# Altium PCB Plate.PcbDoc (part 1 of 2)
Units mm, origin at the board's own origin, x right, y up, seen from the top; angles counter-clockwise.
Board outline 61.6 x 65.4 mm, 4 copper layers (Top Layer, MID1, MID2, Bottom Layer), stack 1.082 mm thick; 79 components, 55 nets, 335 pads, 121 vias.
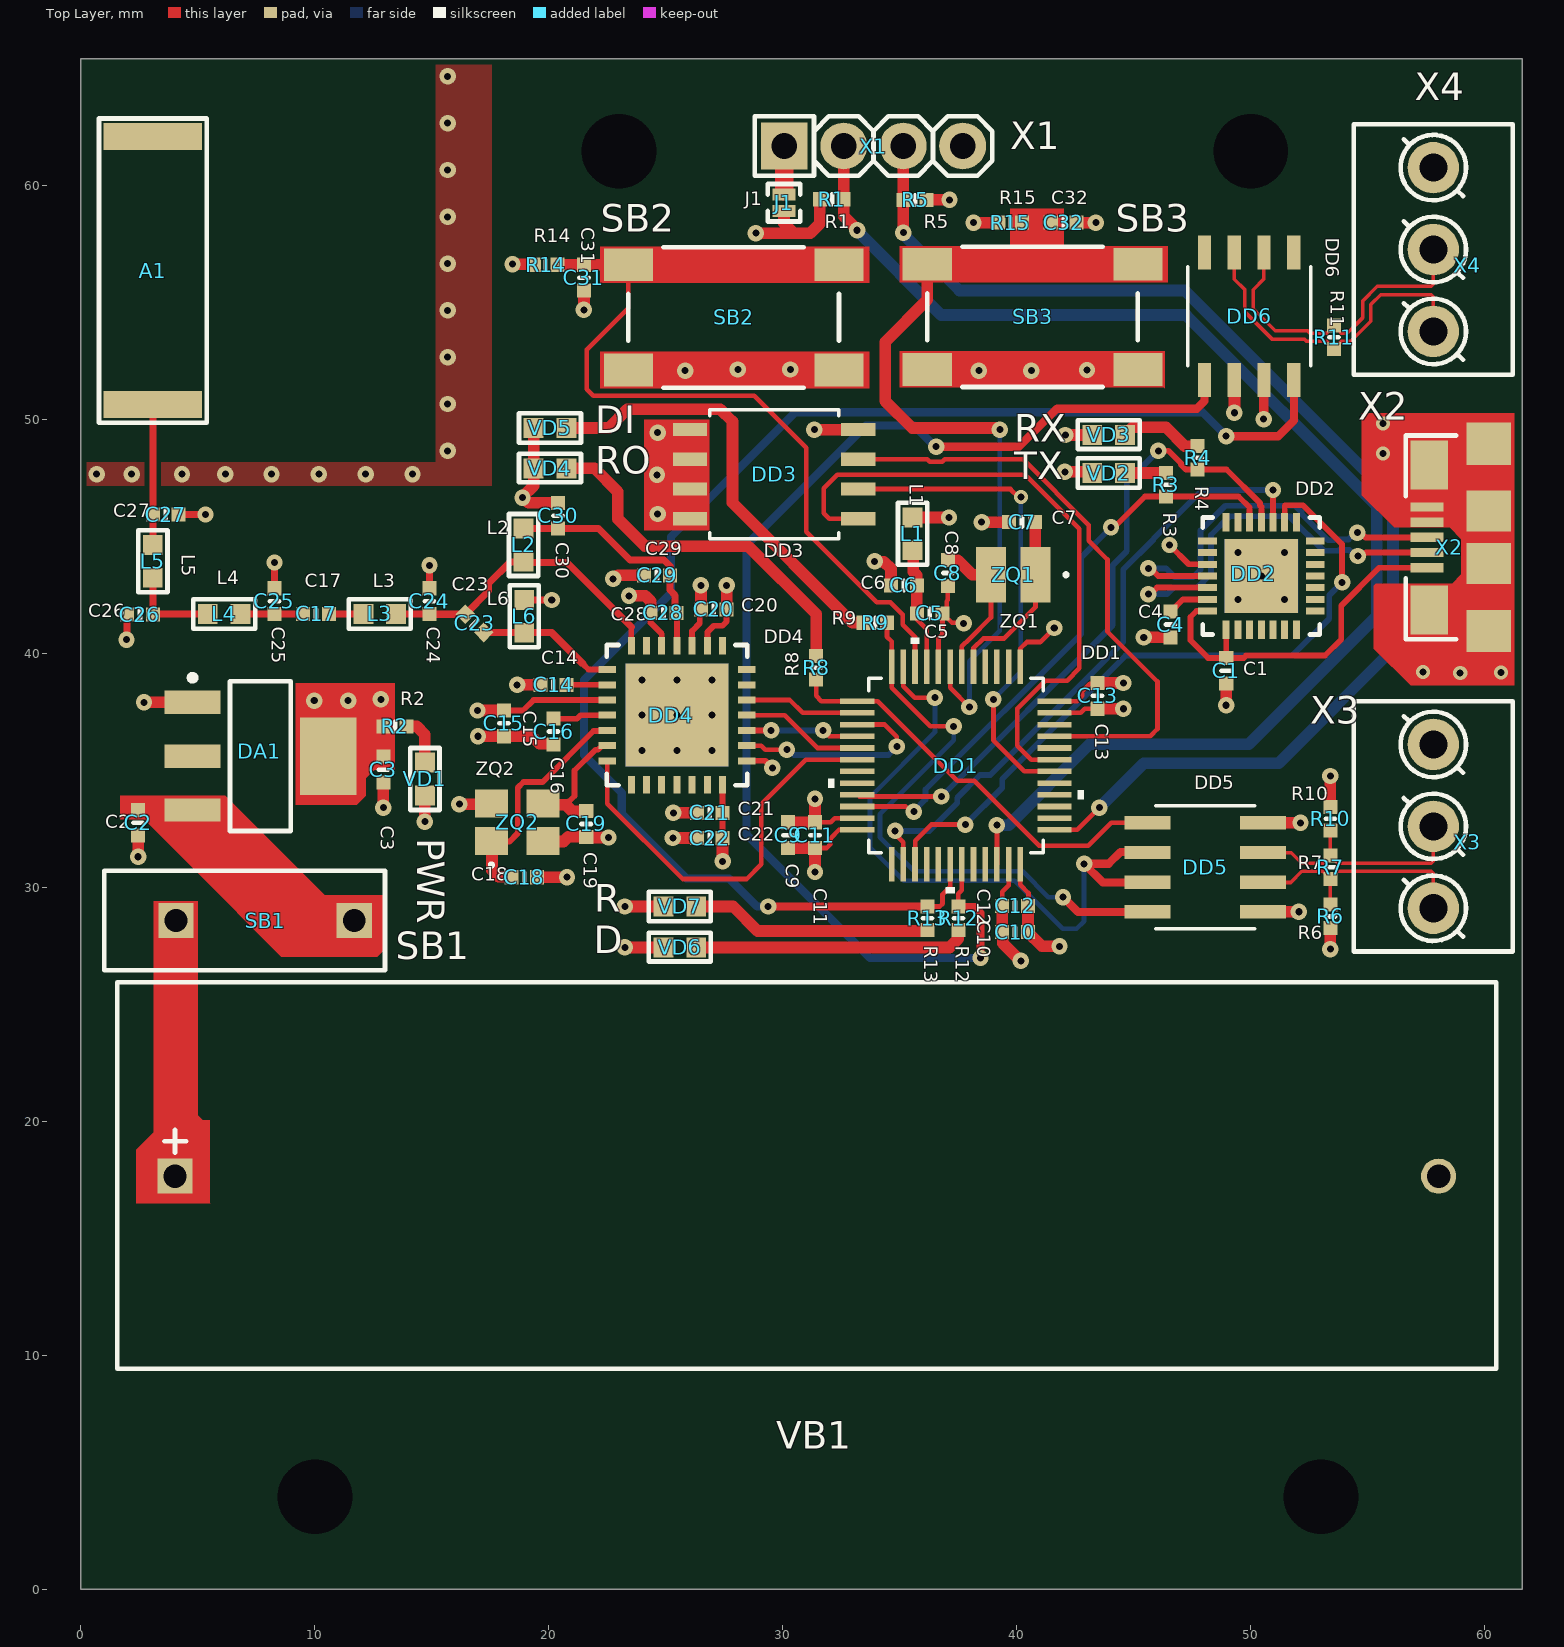
[diagram p0: Top Layer view]
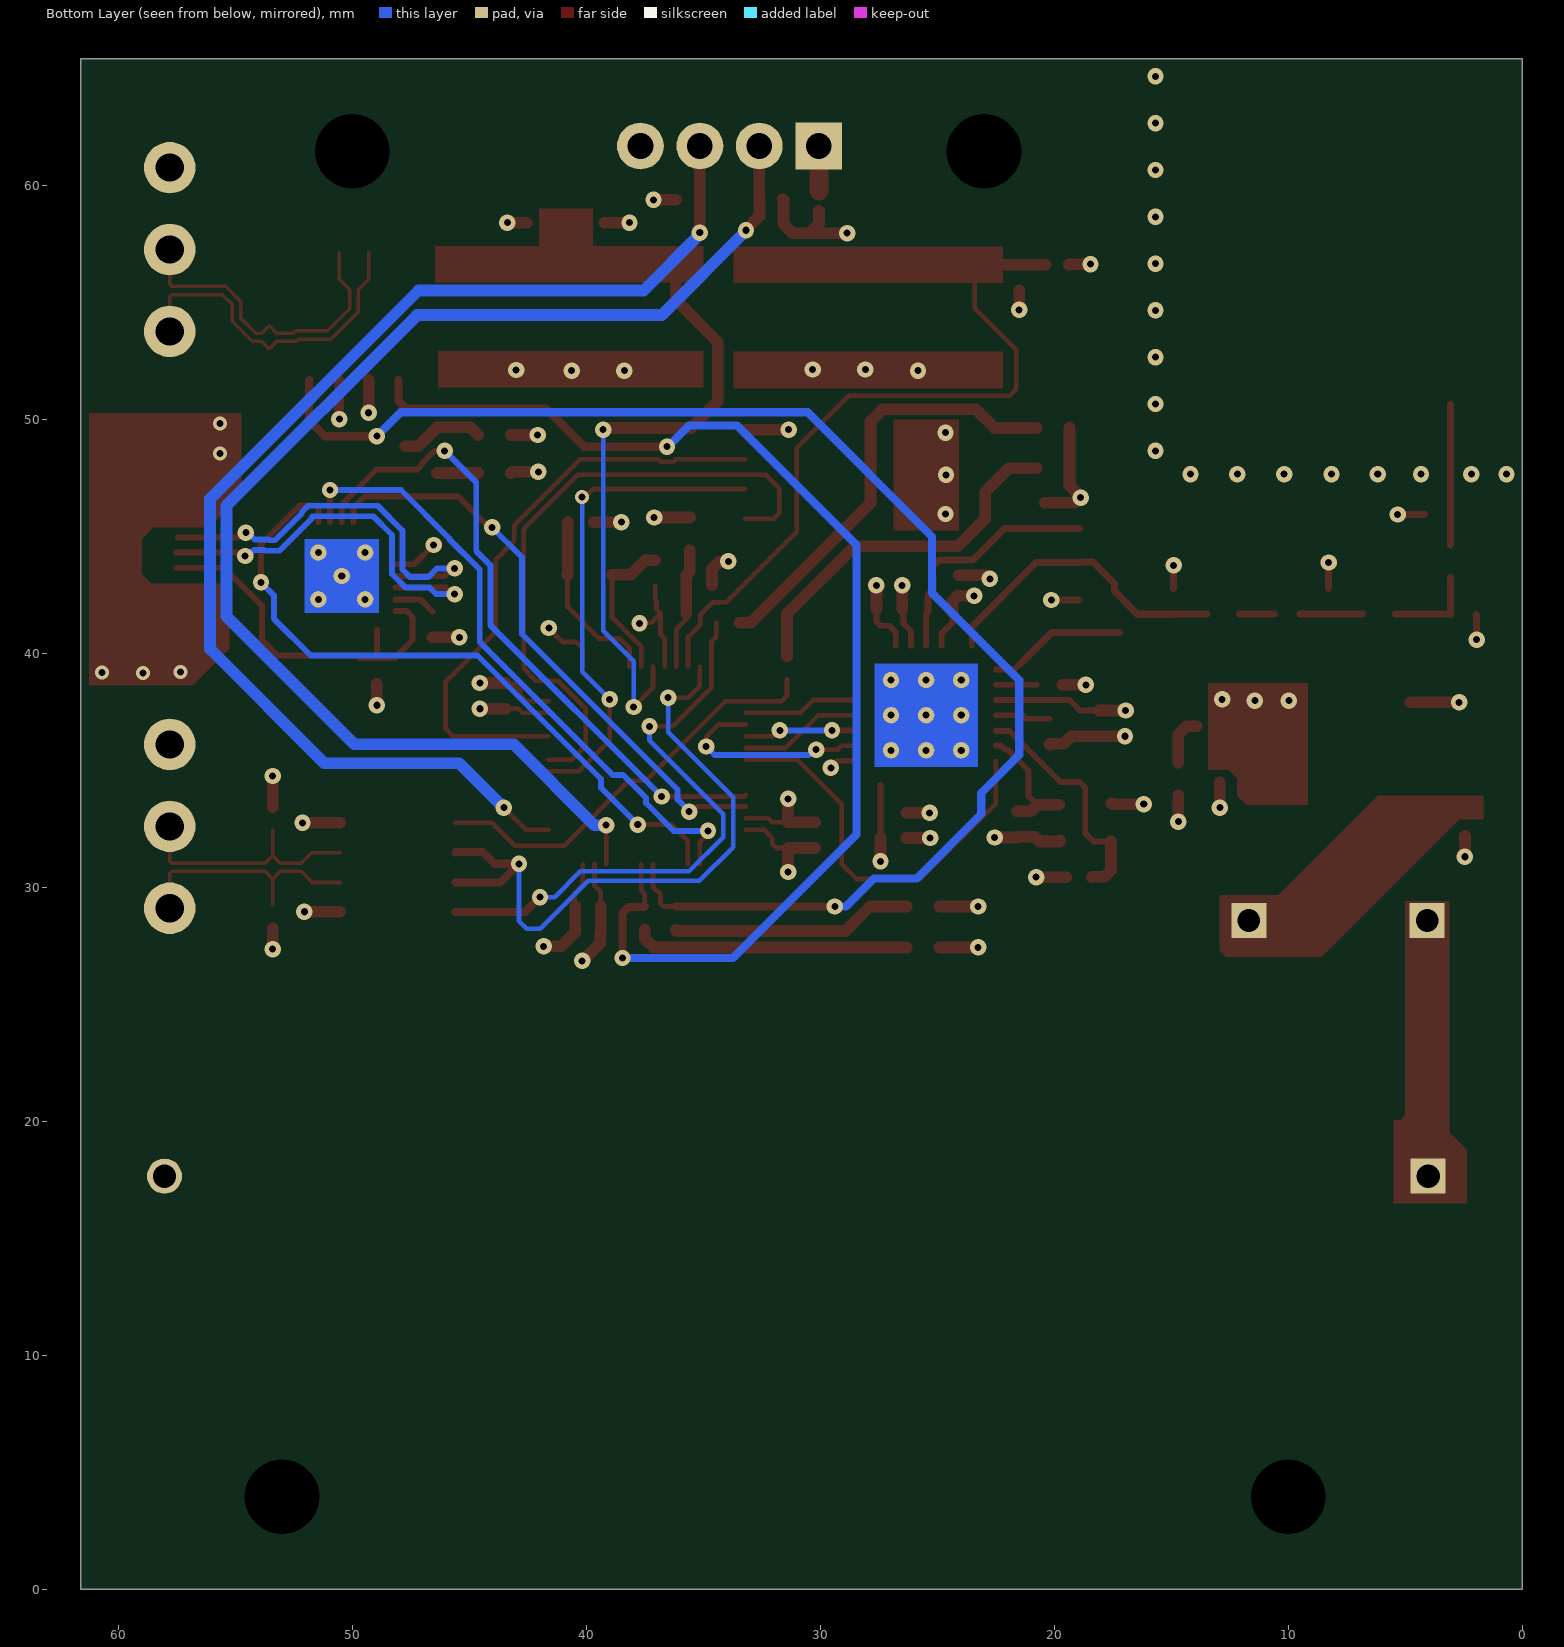
[diagram p1: Bottom Layer view, seen from below]
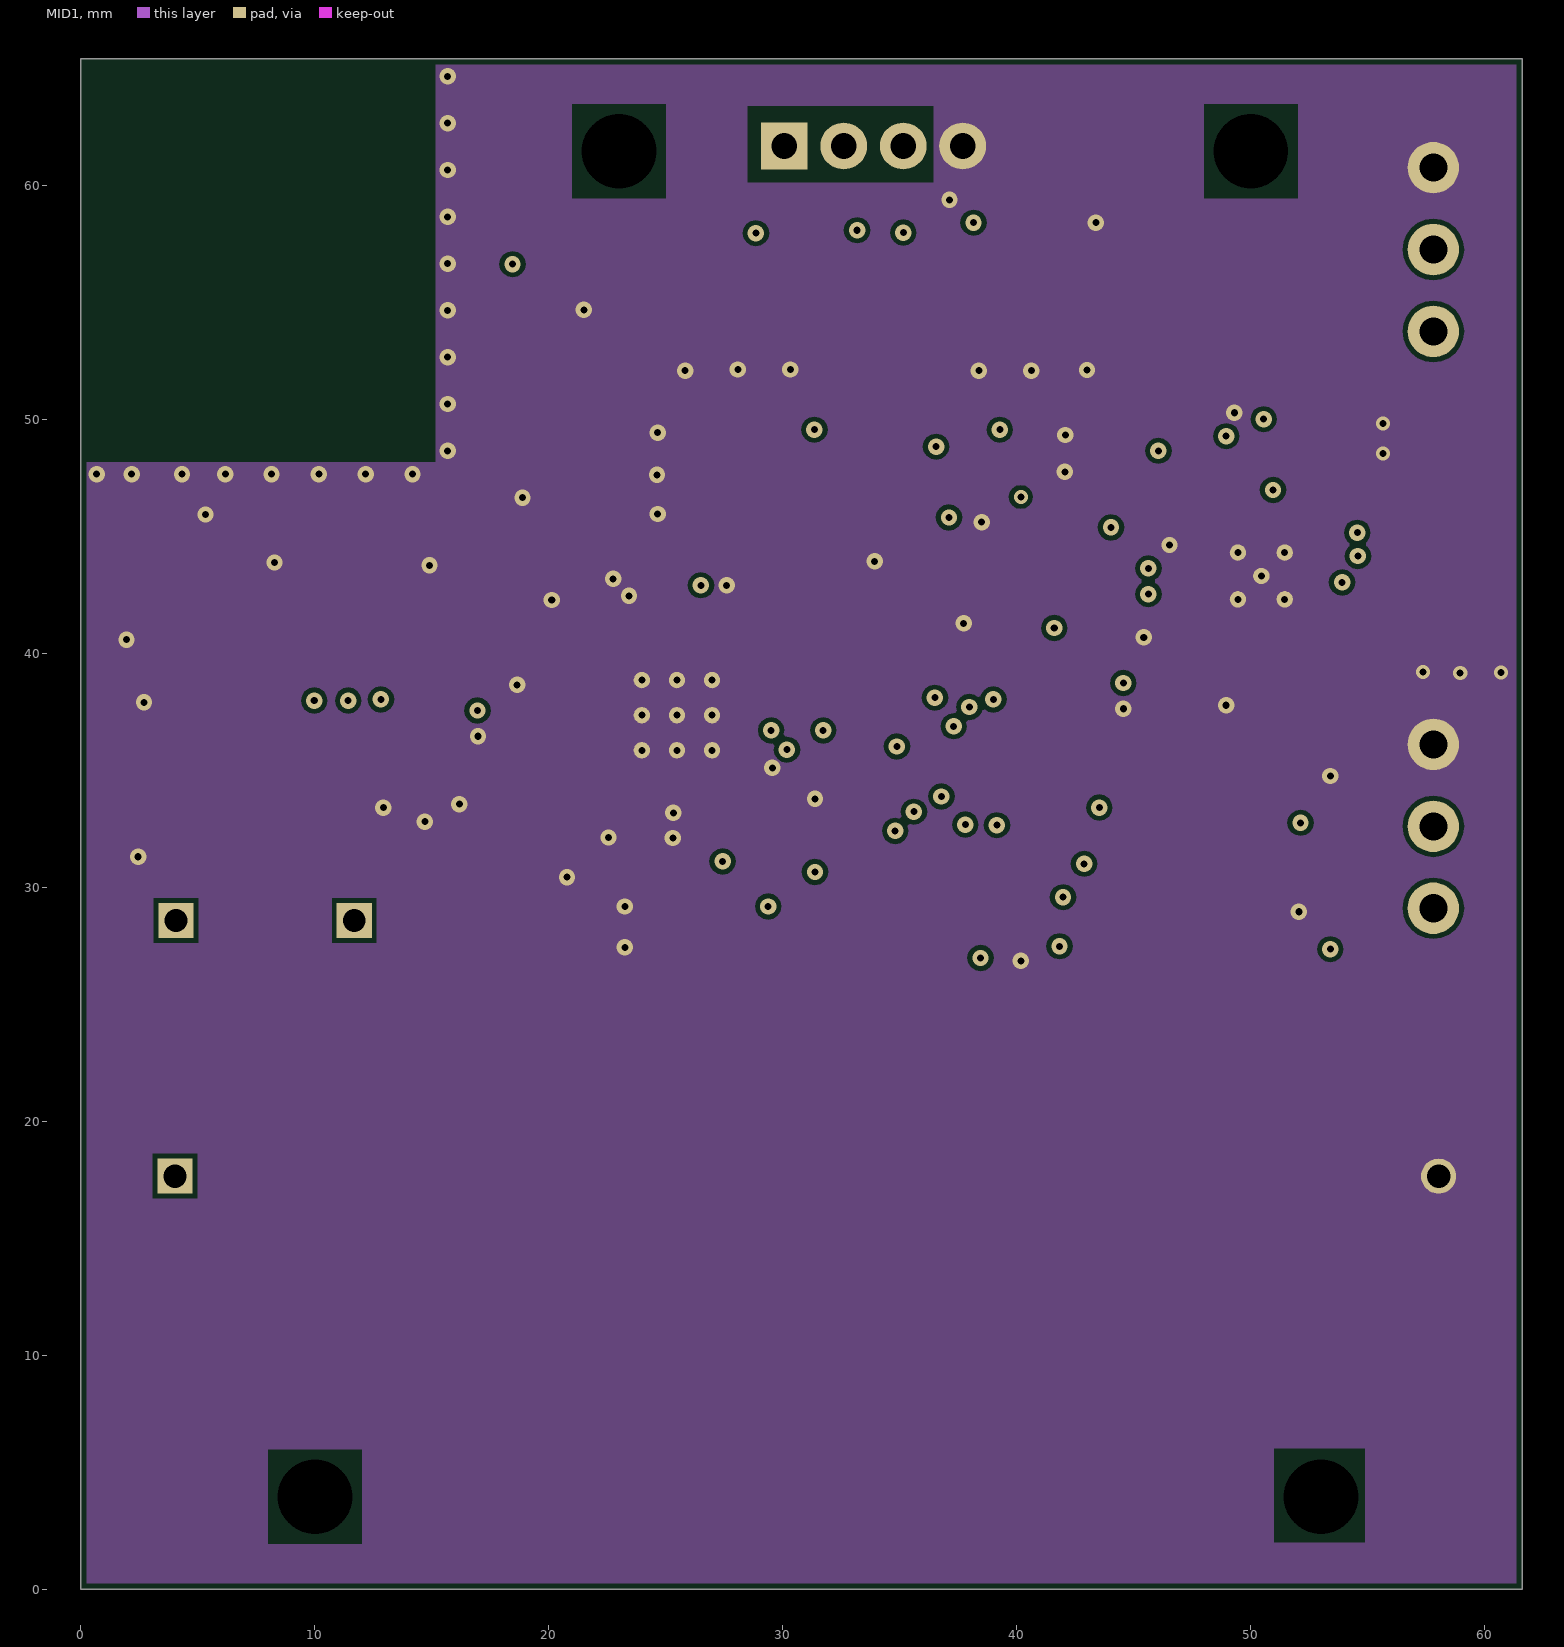
[diagram p2: MID1]
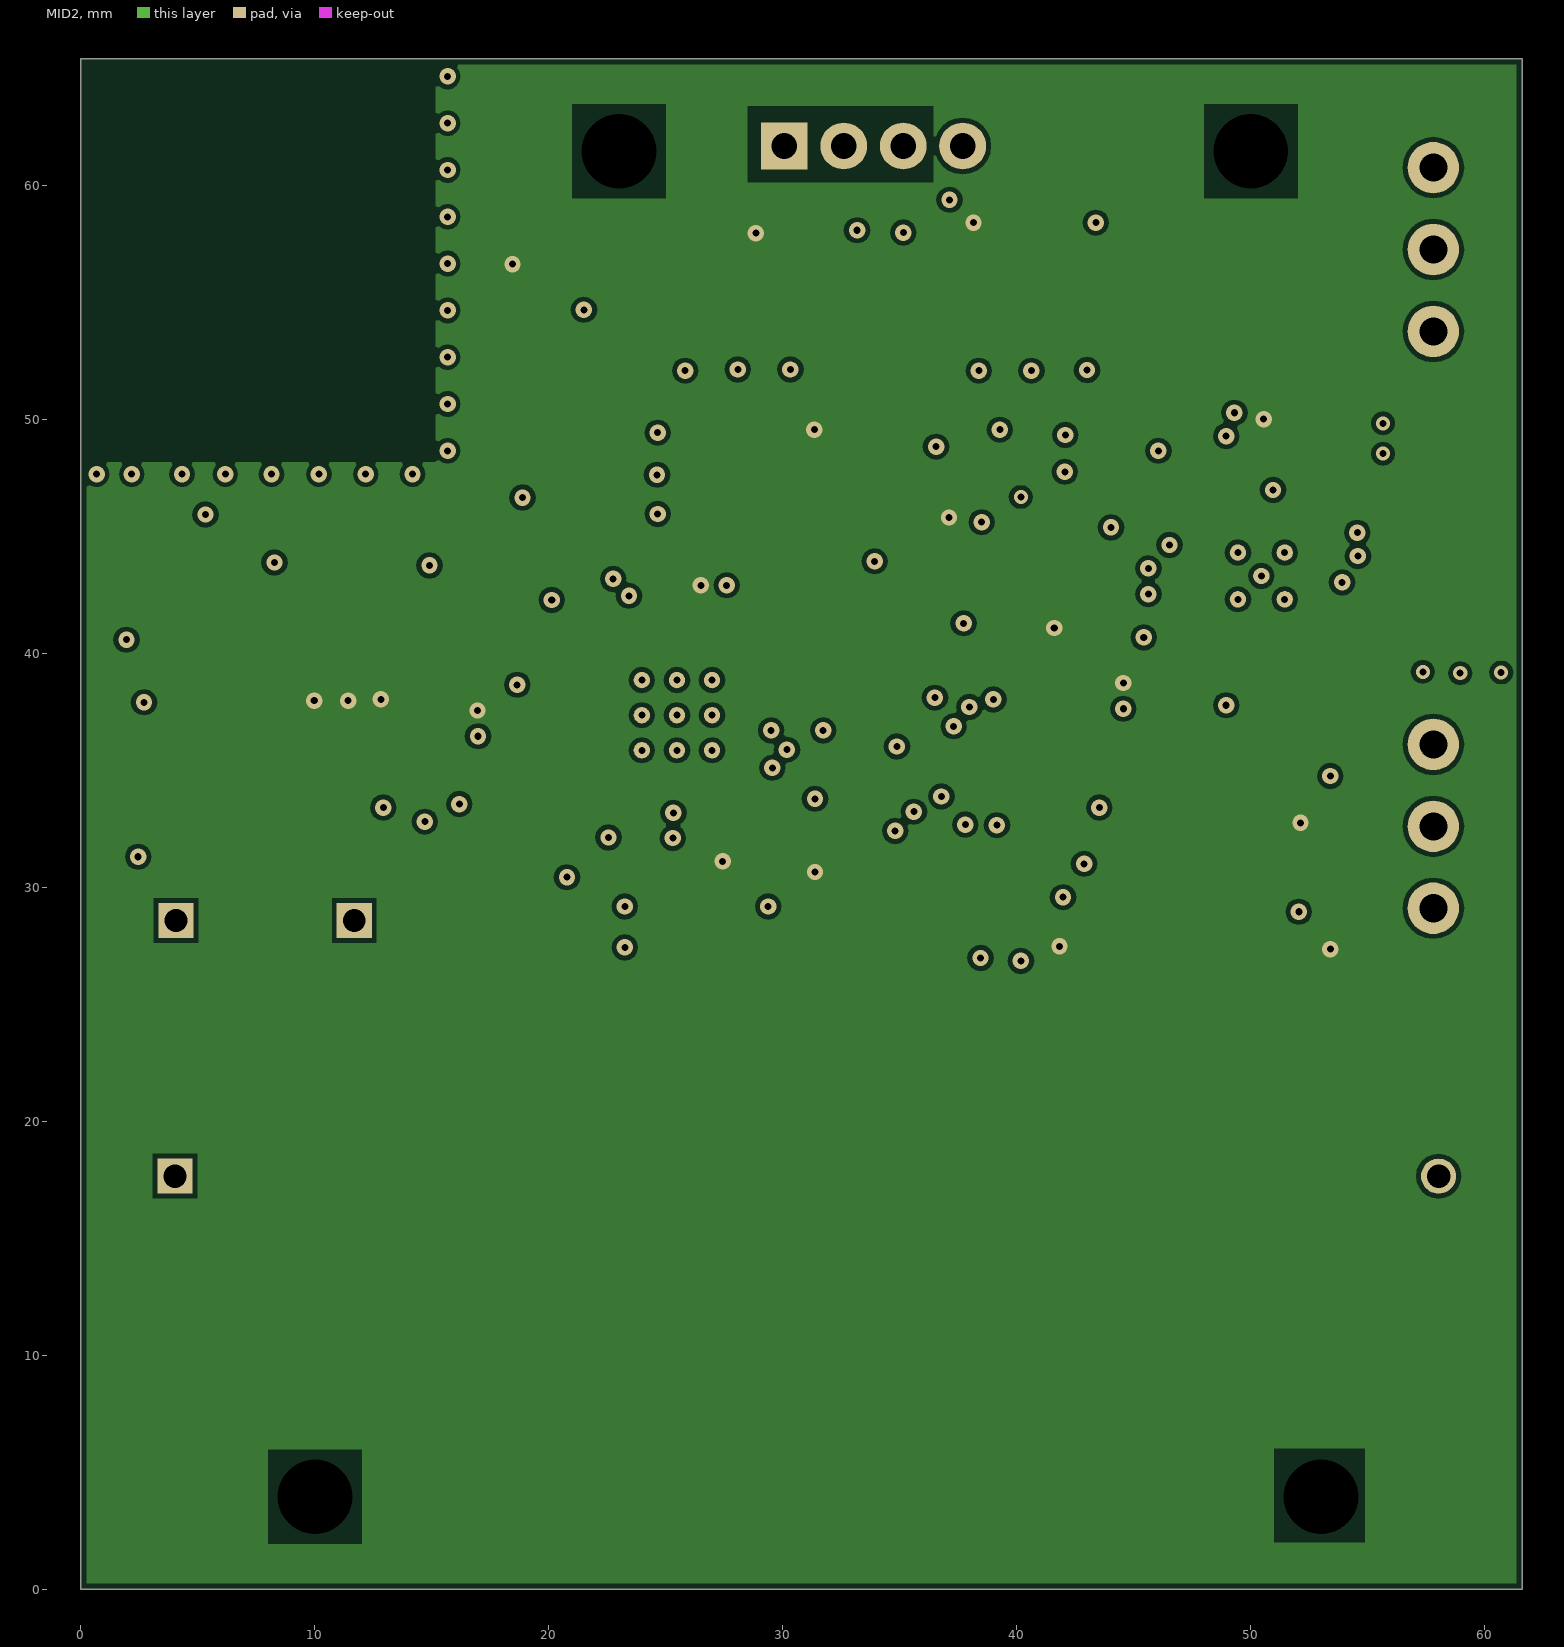
[diagram p3: MID2]
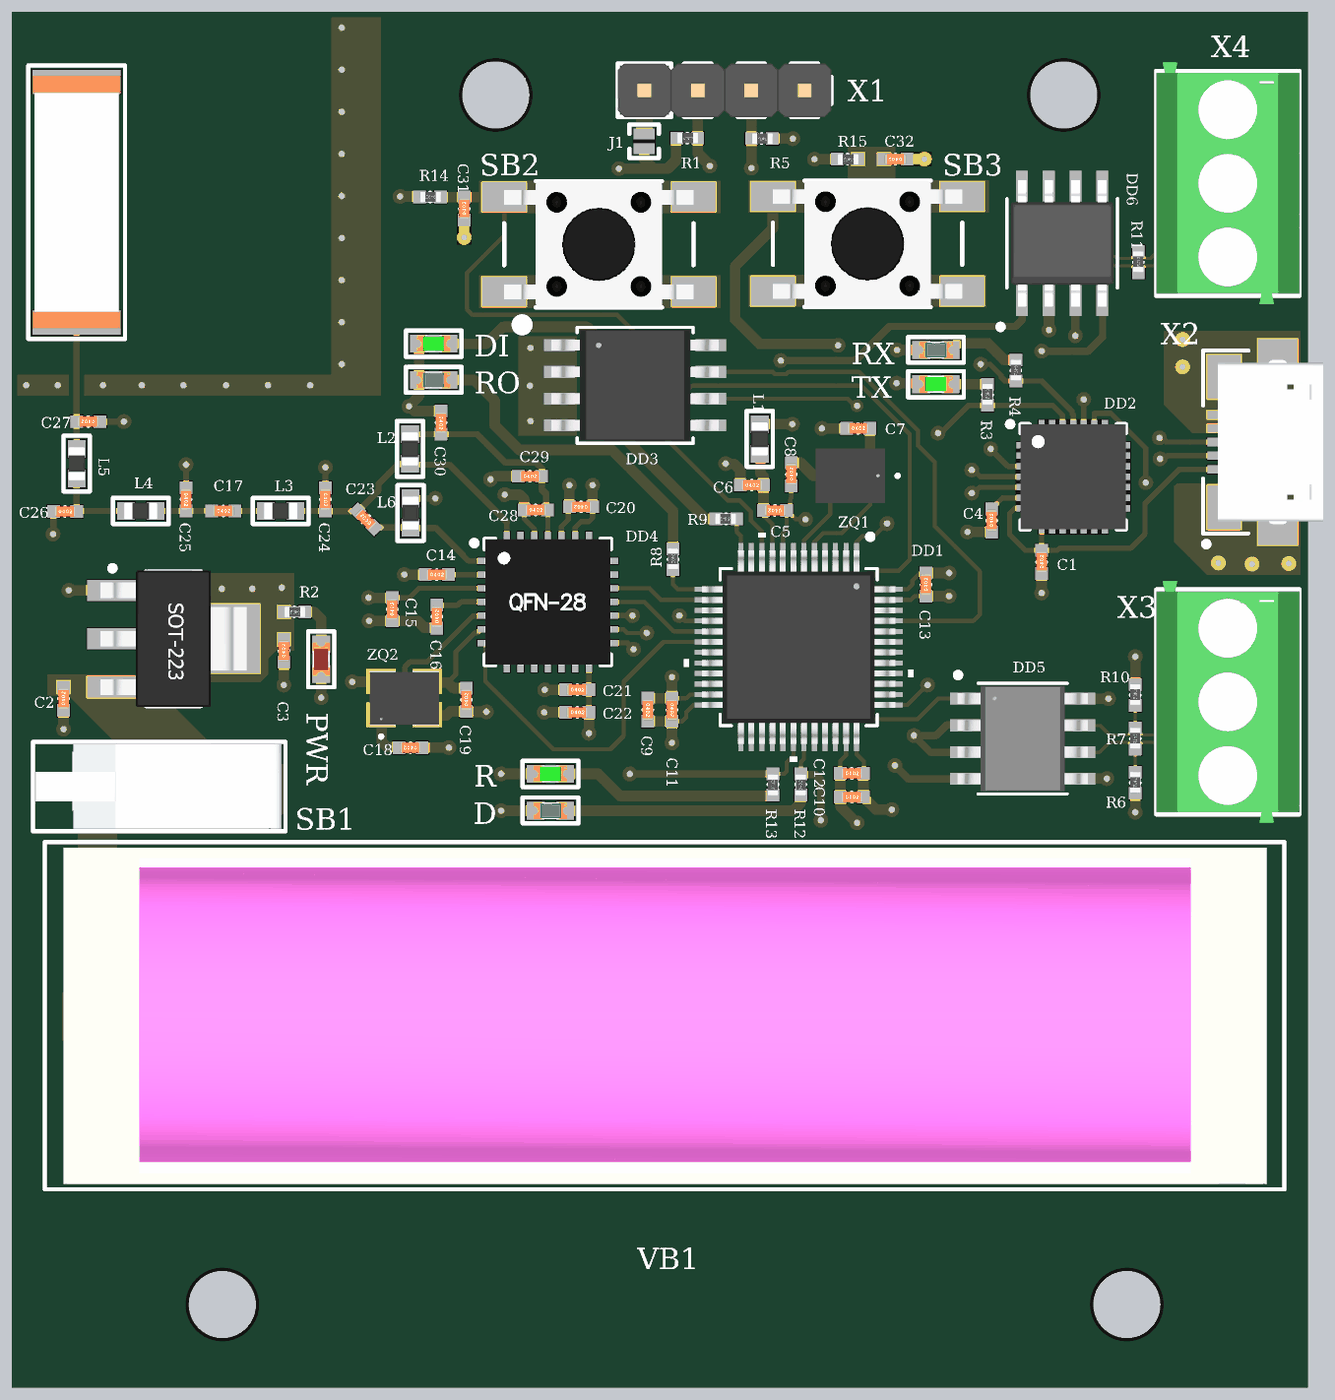
[diagram p4: 3D render of the assembled board from above, using the file's embedded part models]

## Layer stack, top to bottom
Top Solder: solder mask 0.02, Solder Resist, Dk 4
Top Layer: signal copper 0.018
Dielectric 2: prepreg 0.15, FR-4, Dk 4.7
MID1: signal copper 0.018
Dielectric 1: core 0.71, FR-4, Dk 4.7
MID2: signal copper 0.018
Dielectric 3: prepreg 0.15, FR-4, Dk 4.7
Bottom Layer: signal copper 0.018
Bottom Solder: solder mask 0.02, Solder Resist, Dk 4

## Board outline
0,0 61.6,0 61.6,65.4 0,65.4

## Design rules (kind name [scope] priority, off if disabled: settings)
AcuteAngle [All] p1: minimum=3.50000000000000E+0001 checktracksonly=FALSE
BoardOutlineClearance "BoardOutlineClearance 1" [All] p1: gap=0.25 ignorepadtopadclearanceinfootprint=FALSE except(0: Arc-SplitContinuation Track-SplitContinuation SMDPad-SplitContinuation THPad-SplitContinuation Via-SplitContinuation Fill-SplitContinuation Poly-SplitContinuation Region-SplitContinuation Text-SplitContinuation) // Milling
BoardOutlineClearance "BoardOutlineClearance 2" [All] p2: gap=0.4 ignorepadtopadclearanceinfootprint=FALSE except(0: Arc-SplitContinuation Track-SplitContinuation SMDPad-SplitContinuation THPad-SplitContinuation Via-SplitContinuation Fill-SplitContinuation Poly-SplitContinuation Region-SplitContinuation Text-SplitContinuation) // V-Cut
Clearance "Clearance-1 1/2 Oz" [All] p1: gap=0.2 ignorepadtopadclearanceinfootprint=FALSE // Standart
Clearance "Clearance-2 1/2 Oz" [All] p2: gap=0.1 ignorepadtopadclearanceinfootprint=FALSE except(0.15: Arc-Fill Arc-Poly Track-Fill Track-Poly SMDPad-SMDPad SMDPad-Fill SMDPad-Poly THPad-Fill THPad-Poly Via-Fill Via-Poly Fill-Fill Fill-Poly Poly-Poly Poly-Region Poly-Text; 0.25: Arc-Hole Track-Hole SMDPad-Hole THPad-Hole Via-Hole Fill-Hole Poly-Hole Region-Hole Text-Hole) // Advance
DiffPairsRouting "DiffPairsRouting 1/2 Oz" [All] p1: maxlimit=0.254 minlimit=0.1 mostfreqgap=0.2 toplayer_minwidth=0.1 toplayer_maxwidth=0.381 toplayer_prefwidth=0.15 midlayer1_minwidth=0.1 midlayer1_maxwidth=0.381 midlayer1_prefwidth=0.15 midlayer2_minwidth=0.1 midlayer2_maxwidth=0.381 midlayer2_prefwidth=0.15 bottomlayer_minwidth=0.1 bottomlayer_maxwidth=0.381 bottomlayer_prefwidth=0.15 maxuncoupledlength=12.7
HoleSize "Minimum HoleSize VIA 1" [IsVia] p1: absolutevalues=TRUE maxlimit=5.9 minlimit=0.3 maxpercent=80.000 minpercent=20.000 // Standart
HoleSize "Minimum HoleSize VIA 2" [IsVia] p2: absolutevalues=TRUE maxlimit=5.9 minlimit=0.2 maxpercent=80.000 minpercent=20.000 // Advance
HoleToHoleClearance Hole2HoleClearance [All] p1: gap=0.25 allowstackedmicrovias=FALSE
MinimumAnnularRing "Minimum AR VIA Standart" [All] p1: minimumring=0.15
MinimumAnnularRing "Minimum AR PAD Standart" [All] p2: minimumring=0.2
MinimumAnnularRing "Minimum AR VIA Advance" [All] p3: minimumring=0.1
MinimumAnnularRing "Minimum AR PAD Advance" [All] p4: minimumring=0.15
MinimumSolderMaskSliver "SolderMask Bridge Standart" [All] p1: minsoldermaskwidth=0.15 // All Masks
MinimumSolderMaskSliver "SolderMask Bridge Advance" [All] p2: minsoldermaskwidth=0.1 // Mask LDI
PlaneClearance "PlaneClearance-1 1/2 Oz" [All] p1: clearance=0.2 // Standart
PlaneClearance "PlaneClearance-2 1/2 Oz" [All] p2: clearance=0.15 // Advance
PlaneConnect "TermalConnect-1 1/2 Oz" [All] p1: planeconnectstyle=Relief reliefexpansion=0.2 reliefentries=4 reliefconductorwidth=0.2 reliefairgap=0.2 // Standart
PlaneConnect "TermalConnect-2 1/2 Oz" [All] p2: pad.planeconnectstyle=Relief pad.reliefexpansion=0.15 pad.reliefentries=4 pad.reliefconductorwidth=0.15 pad.reliefairgap=0.15 via.planeconnectstyle=Direct via.reliefexpansion=0.15 via.reliefentries=4 via.reliefconductorwidth=0.15 via.reliefairgap=0.15 // Advance
PolygonConnect PolygonConnect_2 [InNet('No Net') vs InNet('GND')] p1: connectstyle=NoConnect reliefconductorwidth=0.254 reliefentries=4 polygonreliefangle="90 Angle" airgapwidth=0.3
PolygonConnect PolygonConnect_1 [InNet('+3.3V')] p2: connectstyle=Direct reliefconductorwidth=0.254 reliefentries=4 polygonreliefangle="90 Angle" airgapwidth=0.254
PolygonConnect [InNet('GND')] p3: connectstyle=Direct reliefconductorwidth=0.254 reliefentries=4 polygonreliefangle="90 Angle" airgapwidth=0.254
PolygonConnect "PolygonConnect-1 1/2 Oz" [All] p4: thpad.connectstyle=Relief thpad.reliefconductorwidth=0.15 thpad.reliefentries=4 thpad.polygonreliefangle="90 Angle" thpad.airgapwidth=0.2 smdpad.connectstyle=Relief smdpad.reliefconductorwidth=0.2 smdpad.reliefentries=4 smdpad.polygonreliefangle="90 Angle" smdpad.airgapwidth=0.2 via.connectstyle=Direct via.reliefconductorwidth=0.254 via.reliefentries=4 via.polygonreliefangle="90 Angle" via.airgapwidth=0.254 // Standart
PolygonConnect "PolygonConnect-2 1/2 Oz" [All] p5: thpad.connectstyle=Relief thpad.reliefconductorwidth=0.125 thpad.reliefentries=4 thpad.polygonreliefangle="90 Angle" thpad.airgapwidth=0.15 smdpad.connectstyle=Relief smdpad.reliefconductorwidth=0.125 smdpad.reliefentries=4 smdpad.polygonreliefangle="90 Angle" smdpad.airgapwidth=0.15 via.connectstyle=Direct via.reliefconductorwidth=0.254 via.reliefentries=4 via.polygonreliefangle="90 Angle" via.airgapwidth=0.254 // Advance
RoutingCorners [All] p1 off: cornerstyle=45-Degree minsetback=2.54 maxsetback=2.54
RoutingVias [All] p1: holewidth=0.3 width=0.6 viastyle="Through Hole" minholewidth=0.2 minwidth=0.4 maxholewidth=5.9 maxwidth=6.4
SilkToSilkClearance Silk2SilkClearance [All] p1 off: silktosilkclearance=0.15
SilkToSolderMaskClearance Silk2SolderMaskClearance [IsPad] p1 off: minsilkscreentomaskgap=0.15 clearancetoexposedcopper=TRUE
SolderMaskExpansion SolderMaskExpansion-1 [All] p1: expansion=0.05 // Standart
SolderMaskExpansion "SolderMaskExpansion LDI" [All] p2: expansion=0.025 // Advance
UnRoutedNet [All] p1: checkbadconnections=TRUE
Width "Width 1/2 Oz" [All] p1: maxlimit=10 minlimit=0.1 preferedwidth=0.125 checkconnectedcopper=TRUE
20 further rules are at their usual default settings.

## Classes and differential pairs
differential pair USB: +USB_P -USB_N
differential pair CAN: +CAN_P -CAN_N
differential pair 485: +485_P -485_N

## Components (designator, comment, footprint, x,y, rotation, side; value= is the part's Value field where it differs from the comment)
A1 "ACAG1204-433-T" ACAG1204-433-T 3.075,56.35 r90 top
C1 "Ceramic_0402" "CAP: 0402" 48.95,39.25 r90 top value="100 нФ"
C2 "Ceramic_0402" "CAP: 0402" 2.45,32.75 r90 top value="1 мкФ"
C3 "Ceramic_0402" "CAP: 0402" 12.925,35.025 r90 top value="4,7 мкФ"
C4 "Ceramic_0402" "CAP: 0402" 46.575,41.225 r90 top value="100 нФ"
C5 "Ceramic_0402" "CAP: 0402" 36.275,41.7 r180 top value="1 мкФ"
C6 "Ceramic_0402" "CAP: 0402" 35.175,42.9 r0 top value="100 нФ"
C7 "Ceramic_0402" "CAP: 0402" 40.225,45.6 r0 top value="6 пФ"
C8 "Ceramic_0402" "CAP: 0402" 37.05,43.425 r90 top value="6 пФ"
C9 "Ceramic_0402" "CAP: 0402" 30.225,32.225 r270 top value="100 нФ"
C10 "Ceramic_0402" "CAP: 0402" 39.925,28.075 r0 top value="100 нФ"
C11 "Ceramic_0402" "CAP: 0402" 31.375,32.225 r270 top value="100 нФ"
C12 "Ceramic_0402" "CAP: 0402" 39.925,29.2 r0 top value="100 нФ"
C13 "Ceramic_0402" "CAP: 0402" 43.45,38.175 r90 top value="1 мкФ"
C14 "Ceramic_0402" "CAP: 0402" 20.2,38.65 r0 top value="100 нФ"
C15 "Ceramic_0402" "CAP: 0402" 18.075,37 r90 top value="100 нФ"
C16 "Ceramic_0402" "CAP: 0402" 20.2,36.65 r90 top value="100 нФ"
C17 "Ceramic_0402" "CAP: 0402" 10.05,41.675 r0 top value="47 пФ"
C18 "Ceramic_0402" "CAP: 0402" 18.95,30.425 r180 top value="6 пФ"
C19 "Ceramic_0402" "CAP: 0402" 21.6,32.7 r90 top value="6 пФ"
C20 "Ceramic_0402" "CAP: 0402" 27.05,41.875 r180 top value="100 нФ"
C21 "Ceramic_0402" "CAP: 0402" 26.875,33.175 r0 top value="47 пФ"
C22 "Ceramic_0402" "CAP: 0402" 26.875,32.1 r0 top value="100 нФ"
C23 "Ceramic_0402" "CAP: 0402" 16.825,41.275 r135 top value="2,2 пФ"
C24 "Ceramic_0402" "CAP: 0402" 14.9,42.225 r270 top value="6,8 пФ"
C25 "Ceramic_0402" "CAP: 0402" 8.275,42.225 r270 top value="15 пФ"
C26 "Ceramic_0402" "CAP: 0402" 2.525,41.65 r0 top value="12 пФ"
C27 "Ceramic_0402" "CAP: 0402" 3.625,45.925 r180 top value="6,8 пФ"
C28 "Ceramic_0402" "CAP: 0402" 24.9,41.725 r0 top value="10 нФ"
C29 "Ceramic_0402" "CAP: 0402" 24.625,43.325 r0 top value="47 пФ"
C30 "Ceramic_0402" "CAP: 0402" 20.4,45.875 r270 top value="47 пФ"
C31 "Ceramic_0402" "CAP: 0402" 21.5,56.05 r90 top value="100 нФ"
C32 "Ceramic_0402" "CAP: 0402" 42,58.4 r180 top value="100 нФ"
DA1 "LDL1117S33R" SOT223 7.675,35.6 r0 top
DD1 "STM32L151C6T6" LQFP-48 37.4,35.2 r270 top value=Value
DD2 "CP2102N" "28-QFN (5x5)" 50.45,43.3 r0 top
DD3 "24LC512-I/SM" SOIC8-W_MC 29.625,47.65 r0 top value=Value
DD4 "SX1276IMLTRT" "28-QFN (6x6)" 25.475,37.35 r0 top value=Value
DD5 "ADM3485ARZ" R_8 48.05,30.85 r0 top value=Value
DD6 "SN65HVD232" D8 49.925,54.4 r90 top value=Value
J1 "=ValueManufacturerPartNumber" "CON: JUMPER x1" 30.05,59.6 r270 top
L1 "Inductor_0603" "IND: 0603" 35.55,45.1 r90 top value="10 мкГн"
L2 "Inductor_0603" "IND: 0603" 18.925,44.625 r270 top value="4,7 нГн"
L3 "Inductor_0603" "IND: 0603" 12.775,41.675 r0 top value="22 нГн"
L4 "Inductor_0603" "IND: 0603" 6.125,41.675 r0 top value="22 нГн"
L5 "Inductor_0603" "IND: 0603" 3.075,43.925 r270 top value="18 нГн"
L6 "Inductor_0603" "IND: 0603" 18.95,41.575 r90 top value="18 нГн"
R1 "Resistor_0402" "RES: 0402" 32.1,59.4 r180 top value="10 кОм"
R2 "Resistor_0402" "RES: 0402" 13.425,36.875 r180 top value="36 Ом"
R3 "Resistor_0402" "RES: 0402" 46.375,47.2 r270 top value="5,1 Ом"
R4 "Resistor_0402" "RES: 0402" 47.725,48.35 r270 top value="5,1 Ом"
R5 "Resistor_0402" "RES: 0402" 35.65,59.375 r180 top value="10 кОм"
R6 "Resistor_0402" "RES: 0402" 53.4,28.75 r270 top value="4,7 кОм"
R7 "Resistor_0402" "RES: 0402" 53.4,30.85 r270 top value="120 Ом"
R8 "Resistor_0402" "RES: 0402" 31.425,39.375 r270 top value="5,1 Ом"
R9 "Resistor_0402" "RES: 0402" 33.95,41.3 r0 top value="5,1 Ом"
R10 "Resistor_0402" "RES: 0402" 53.4,32.925 r270 top value="4,7 кОм"
R11 "Resistor_0402" "RES: 0402" 53.55,53.5 r270 top value="120 Ом"
R12 "Resistor_0402" "RES: 0402" 37.5,28.675 r90 top value="5,1 Ом"
R13 "Resistor_0402" "RES: 0402" 36.175,28.675 r90 top value="5,1 Ом"
R14 "Resistor_0402" "RES: 0402" 19.875,56.6 r180 top value="1 кОм"
R15 "Resistor_0402" "RES: 0402" 39.725,58.4 r180 top value="1 кОм"
SB1 "DS1040-01RT" DS1040-01RT 7.875,28.575 r0 top
SB2 "Кнопка тактовая SMD, 6x6x5 мм" "BUT: 6x6 SMD" 27.9,54.35 r0 top
SB3 "Кнопка тактовая SMD, 6x6x5 мм" "BUT: 6x6 SMD" 40.675,54.375 r0 top
VB1 "AA Battery" "AA Holder" 31.025,17.65 r0 top
VD1 "LED_single" "LED: 0603R" 14.7,34.625 r270 top
VD2 "LED_single" "LED: 0603G" 43.925,47.7 r180 top
VD3 "LED_single" "LED: 0603B" 43.925,49.325 r180 top
VD4 "LED_single" "LED: 0603B" 20.05,47.9 r180 top
VD5 "LED_single" "LED: 0603G" 20.05,49.625 r180 top
VD6 "LED_single" "LED: 0603B" 25.6,27.425 r180 top
VD7 "LED_single" "LED: 0603G" 25.6,29.175 r180 top
X1 "Connector, 4pin, 2.54mm, 500VAC, 3A" "CON: PLS-4" 33.875,61.675 r0 top
X2 "Разъем micro-USB" "CON: USB micro-A (ZX62-B-5PA)" 57.525,44.95 r90 top
X3 "Клеммник трехконтактный, 3pin, 3.5mm, 300VAC, 10A" "CON: DG350-3.5-03P" 57.8,32.6 r90 top
X4 "Клеммник трехконтактный, 3pin, 3.5mm, 300VAC, 10A" "CON: DG350-3.5-03P" 57.8,57.25 r90 top
ZQ1 "NX3225GD" XTAL_NX3225GD-8M 39.85,43.35 r180 top value="8 МГц"
ZQ2 "NX3225GA" NX3225GA-16.000M 18.65,32.775 r90 top value="32 МГц"

## Footprints (in the part's own frame and the unit in brackets; to place one, negate y for a bottom-side part, rotate by r counter-clockwise, add the part's x,y. Pads: shape width x height; smd on the part's side, far side on the other; paste and mask are expansions set on the pad)
"28-QFN (5x5)" [mm] "5x5 mm, pitch 0.5 mm, power pad"
  round 0.7 hole 0.3: 0(-1,-1) 0(-1,1) 0(0,0) 0(1,-1) 0(1,1)
  rect 3.15x3.15 smd: 0(0,0)
  rect 0.8x0.3 smd: 1(-2.3,1.5) 2(-2.3,1) 3(-2.3,0.5) 4(-2.3,0) 5(-2.3,-0.5) 6(-2.3,-1) 7(-2.3,-1.5) 15(2.3,-1.5) 16(2.3,-1) 17(2.3,-0.5) 18(2.3,0) 19(2.3,0.5) 20(2.3,1) 21(2.3,1.5)
  rect 0.3x0.8 smd: 8(-1.5,-2.3) 9(-1,-2.3) 10(-0.5,-2.3) 11(0,-2.3) 12(0.5,-2.3) 13(1,-2.3) 14(1.5,-2.3) 22(1.5,2.3) 23(1,2.3) 24(0.5,2.3) 25(0,2.3) 26(-0.5,2.3) 27(-1,2.3) 28(-1.5,2.3)
  round 0.5 on Top Overlay: ""(-3,2.5)
  round 0.5 on Mech1: ""(-2,2)
  silkscreen extent -2.5,-2.5 2.5,2.5, body extent -2.5,-2.5 2.5,2.5, height 0.9
"28-QFN (6x6)" [mm] "6x6 mm, pitch 0.65 mm, power pad"
  round 0.7 hole 0.3: 0(-1.5,-1.5) 0(-1.5,0) 0(-1.5,1.5) 0(0,-1.5) 0(0,0) 0(0,1.5) 0(1.5,-1.5) 0(1.5,0) 0(1.5,1.5)
  rect 4.4x4.4 smd: 0(0,0)
  rect 0.75x0.3 smd: 1(-2.975,1.95) 2(-2.975,1.3) 3(-2.975,0.65) 4(-2.975,0) 5(-2.975,-0.65) 6(-2.975,-1.3) 7(-2.975,-1.95) 15(2.975,-1.95) 16(2.975,-1.3) 17(2.975,-0.65) 18(2.975,0) 19(2.975,0.65) 20(2.975,1.3) 21(2.975,1.95)
  rect 0.3x0.75 smd: 8(-1.95,-2.975) 9(-1.3,-2.975) 10(-0.65,-2.975) 11(0,-2.975) 12(0.65,-2.975) 13(1.3,-2.975) 14(1.95,-2.975) 22(1.95,2.975) 23(1.3,2.975) 24(0.65,2.975) 25(0,2.975) 26(-0.65,2.975) 27(-1.3,2.975) 28(-1.95,2.975)
  round 0.5 on Top Overlay: ""(-3.5,2.8)
  round 0.5 on Mech1: ""(-2.5,2.5)
  silkscreen extent -3,-3 3,3, body extent -3,-3 3,3, height 1.02
"AA Holder" [mm]
  rect 1.5x1.5 hole 1: 1(-27,0)
  round 1.5 hole 1: 2(27,0)
  silkscreen extent -29.46,-8.23 29.46,8.28, body extent -28.57,-7.98 28.62,8.03, height 15.12
ACAG1204-433-T [mm]
  rect 1.15x4.2 smd: 1(-5.725,0) 2(5.725,0)
  silkscreen extent -6.5,-2.3 6.5,2.3, body extent -6,-2.1 6,2.1, height 1.8
"BUT: 6x6 SMD" [mm] "Leaded Tactile Button 6x6"
  rect 2.1x1.4 smd: 1(-4.5,2.25) 1(4.5,2.25) 2(-4.5,-2.25) 2(4.5,-2.25)
  silkscreen extent -4.5,-3 4.5,3, body extent -4.5,-3 4.5,3, height 4.3
"CAP: 0402" [mm]
  rect 0.6x0.6 smd: 1(-0.55,0) 2(0.55,0)
  silkscreen extent 0,-0.2 0,0.2, body extent -0.51,-0.25 0.51,0.25, height 0.51
"CON: DG350-3.5-03P" [mm]
  round 2.2 hole 1.2: 1(-3.5,0) 2(0,0) 3(3.5,0)
  round 0.5 on Top Overlay: ""(-4.85,-2.9)
  silkscreen extent -5.35,-3.4 5.35,3.4, body extent -5.75,-3.4 5.75,3.4, height 8.4
"CON: JUMPER x1" [mm]
  rect 0.5x1 smd: 1(0,0) 2(0.7,0)
  silkscreen extent -0.45,-0.7 1.15,0.7
"CON: PLS-4" [mm] "PLS-40 4 pin header"
  rect 2x2 hole 1.1: 1(-3.81,0)
  round 2 hole 1.1: 2(-1.27,0) 3(1.27,0) 4(3.81,0)
  silkscreen extent -5.08,-1.27 5.08,1.27, body extent -5.08,-1.27 5.08,1.27, height 8.54
"CON: USB micro-A (ZX62-B-5PA)" [mm]
  rect 1.8x1.9 smd: 0(-4,-2.65) 0(4,-2.65)
  rect 2.1x1.6 smd: 0(-3.1,-0.1) 0(3.1,-0.1)
  rect 1.75x1.9 smd: 0(-1.125,-2.65) 0(1.125,-2.65)
  rect 0.4x1.4 smd: 1(-1.3,0) 2(-0.65,0) 3(0,0) 4(0.65,0) 5(1.3,0)
  round 0.5 on Top Overlay: ""(-4.85,0.75)
  silkscreen extent -4.35,-1.25 4.35,0.9, body extent -3.9,-4.8 3.9,0.2, height 2.68
D8 [mm]
  rect 1.455x0.568 smd paste+0 mask+0: 1(-2.721,1.905) 2(-2.721,0.635) 3(-2.721,-0.635) 4(-2.721,-1.905) 5(2.721,-1.905) 6(2.721,-0.635) 7(2.721,0.635) 8(2.721,1.905)
  silkscreen extent -2.12,-2.63 2.12,2.63, body extent -3.01,-2.45 3.01,2.45, height 1.63
DS1040-01RT [mm]
  rect 1.5x1.5 hole 0.97: 1(-3.81,0) 2(3.81,0)
  silkscreen extent -6.88,-2.12 5.13,2.12, body extent -6.75,-2 4.95,2, height 8.05
"IND: 0603" [mm]
  rect 0.85x0.85 smd: 1(-0.7,0) 2(0.7,0)
  silkscreen extent -1.33,-0.63 1.33,0.63, body extent -0.8,-0.4 0.8,0.4, height 0.8
"LED: 0603B" [mm]
  rect 0.85x0.85 smd: 1(-0.7,0) 2(0.7,0)
  silkscreen extent -1.33,-0.63 1.33,0.6, body extent -0.8,-0.4 0.8,0.4, height 0.6
"LED: 0603G" [mm]
  rect 0.85x0.85 smd: 1(-0.7,0) 2(0.7,0)
  silkscreen extent -1.33,-0.63 1.33,0.63, body extent -0.8,-0.4 0.8,0.4, height 0.6
"LED: 0603R" [mm]
  rect 0.85x0.85 smd: 1(-0.7,0) 2(0.7,0)
  silkscreen extent -1.33,-0.63 1.33,0.63, body extent -0.8,-0.4 0.8,0.4, height 0.6
LQFP-48 [mm]
  rect 1.462x0.239 smd paste+0 mask+0: 1(-4.216,2.75) 2(-4.216,2.25) 3(-4.216,1.75) 4(-4.216,1.25) 5(-4.216,0.75) 6(-4.216,0.25) 7(-4.216,-0.25) 8(-4.216,-0.75) 9(-4.216,-1.25) 10(-4.216,-1.75) 11(-4.216,-2.25) 12(-4.216,-2.75) 25(4.216,-2.75) 26(4.216,-2.25) 27(4.216,-1.75) 28(4.216,-1.25) 29(4.216,-0.75) 30(4.216,-0.25) 31(4.216,0.25) 32(4.216,0.75) 33(4.216,1.25) 34(4.216,1.75) 35(4.216,2.25) 36(4.216,2.75)
  rect 0.239x1.462 smd paste+0 mask+0: 13(-2.75,-4.216) 14(-2.25,-4.216) 15(-1.75,-4.216) 16(-1.25,-4.216) 17(-0.75,-4.216) 18(-0.25,-4.216) 19(0.25,-4.216) 20(0.75,-4.216) 21(1.25,-4.216) 22(1.75,-4.216) 23(2.25,-4.216) 24(2.75,-4.216) 37(2.75,4.216) 38(2.25,4.216) 39(1.75,4.216) 40(1.25,4.216) 41(0.75,4.216) 42(0.25,4.216) 43(-0.25,4.216) 44(-0.75,4.216) 45(-1.25,4.216) 46(-1.75,4.216) 47(-2.25,4.216) 48(-2.75,4.216)
  silkscreen extent -5.46,-5.46 5.46,5.46, body extent -4.6,-4.6 4.6,4.6, height 1.6
NX3225GA-16.000M [mm]
  rect 1.194x1.397 smd paste-0.597 mask+0: 1(-0.8,1.1) 2(-0.8,-1.1) 3(0.8,-1.1) 4(0.8,1.1)
  silkscreen extent -1.9,1.02 -1.75,1.18, body extent -1.3,-1.65 1.3,1.65, height 0.89
R_8 [mm]
  rect 1.97x0.568 smd paste+0 mask+0: 1(-2.464,1.905) 2(-2.464,0.635) 3(-2.464,-0.635) 4(-2.464,-1.905) 5(2.464,-1.905) 6(2.464,-0.635) 7(2.464,0.635) 8(2.464,1.905)
  silkscreen extent -2.12,-2.63 2.12,2.63, body extent -3.1,-2.5 3.1,2.5, height 1.76
"RES: 0402" [mm]
  rect 0.6x0.6 smd: 1(-0.5,0) 2(0.5,0)
  silkscreen extent 0,-0.2 0,0.2, body extent -0.52,-0.25 0.47,0.25, height 0.34
SOIC8-W_MC [mil]
  rect 57.56x22.36 smd paste+0 mask+0: 1(-141.5,75) 2(-141.5,25) 3(-141.5,-25) 4(-141.5,-75) 5(141.5,-75) 6(141.5,-25) 7(141.5,25) 8(141.5,75)
  silkscreen extent -108,-108 108,108, body extent -156,-104 156,104, height 80
SOT223 [mm] "SOT223, 4-Leads, Body 6,50x7,00mm (avg), Pitch 2,30mm, IPC Medium Density"
  rect 2.4x1 smd: 1(-2.9,2.3) 2(-2.9,0) 3(-2.9,-2.3)
  rect 2.4x3.3 smd: 4(2.9,0)
  round 0.5 on Mech1: ""(-3,2.7)
  silkscreen extent -3.02,-3.2 1.3,3.47, body extent -3.48,-3.25 3.48,3.25, height 1.65
XTAL_NX3225GD-8M [mil]
  rect 51x94 smd paste+0 mask+0: 1(-37.5,0) 2(37.5,0)
  silkscreen extent -92,-3 -86,3, body extent -65,-51 65,51, height 39

## Part data
A1: "433 MHz 50 Ohm Chip Antenna", Manufacturer="Abracon (США)", PartNumber=ACAG1204-433-T, PrintData="Чип-антенна керамическая ACAG1204-433-T; Abracon (США)", TypeAnt="Чип-антенна керамическая"
C1 C4 C6 C9 C10 C11 C12 C14 C15 C16 C20 C22 C31 C32: Manufacturer=(Китай), Package=0402, PartNumber=CC0402KRX7R7BB104, Temperature=-55...+125°C, Tolerance="± 10%", TypeCapacitor="Чип-конденсатор керамический", TypeDielectric=X5R, ValueManufacturerPartNumber="Чип-конденсатор керамический, 100 нФ, X5R, ± 10%, 25 В, 0402, -55...+125°C", Voltage="25 В", HelpURL=https://www.digikey.com/product-detail/en/yageo/CC0402KRX7R7BB104/311-1338-1-ND/2103122, PrintData="Чип-конденсатор керамический; 0402; 100 нФ ± 10%; 25 В; X5R; (Китай)"
C2 C5 C13: Manufacturer=(Китай), Package=0402, PartNumber=CC0402KRX7R7BB104, Temperature=-55...+125°C, Tolerance="± 10%", TypeCapacitor="Чип-конденсатор керамический", TypeDielectric=X5R, ValueManufacturerPartNumber="Чип-конденсатор керамический, 1 мкФ, X5R, ± 10%, 10 В, 0402, -55...+125°C", Voltage="10 В", HelpURL=https://www.digikey.com/product-detail/en/yageo/CC0402KRX7R7BB104/311-1338-1-ND/2103122, PrintData="Чип-конденсатор керамический; 0402; 1 мкФ ± 10%; 10 В; X5R; (Китай)"
C3: Manufacturer=(Китай), Package=0402, PartNumber=CC0402KRX7R7BB104, Temperature=-55...+125°C, Tolerance="± 10%", TypeCapacitor="Чип-конденсатор керамический", TypeDielectric=X5R, ValueManufacturerPartNumber="Чип-конденсатор керамический, 4,7 мкФ, X5R, ± 10%, 10 В, 0402, -55...+125°C", Voltage="10 В", HelpURL=https://www.digikey.com/product-detail/en/yageo/CC0402KRX7R7BB104/311-1338-1-ND/2103122, PrintData="Чип-конденсатор керамический; 0402; 4,7 мкФ ± 10%; 10 В; X5R; (Китай)"
C7 C8 C18 C19: Manufacturer=(Китай), Package=0402, PartNumber=CC0402KRX7R7BB104, Temperature=-55...+125°C, Tolerance="± 0,25 пФ", TypeCapacitor="Чип-конденсатор керамический", TypeDielectric=NPO, ValueManufacturerPartNumber="Чип-конденсатор керамический, 6 пФ, NPO, ± 0,25 пФ, 50 В, 0402, -55...+125°C", Voltage="50 В", HelpURL=https://www.digikey.com/product-detail/en/yageo/CC0402KRX7R7BB104/311-1338-1-ND/2103122, PrintData="Чип-конденсатор керамический; 0402; 6 пФ ± 0,25 пФ; 50 В; NPO; (Китай)"
C17 C21 C29 C30: Manufacturer=(Китай), Package=0402, PartNumber=CC0402KRX7R7BB104, Temperature=-55...+125°C, Tolerance="± 5%", TypeCapacitor="Чип-конденсатор керамический", TypeDielectric=NPO, ValueManufacturerPartNumber="Чип-конденсатор керамический, 47 пФ, NPO, ± 5%, 50 В, 0402, -55...+125°C", Voltage="50 В", HelpURL=https://www.digikey.com/product-detail/en/yageo/CC0402KRX7R7BB104/311-1338-1-ND/2103122, PrintData="Чип-конденсатор керамический; 0402; 47 пФ ± 5%; 50 В; NPO; (Китай)"
C23: Manufacturer=(Китай), Package=0402, PartNumber=CC0402KRX7R7BB104, Temperature=-55...+125°C, Tolerance="± 0,25 пФ", TypeCapacitor="Чип-конденсатор керамический", TypeDielectric=NPO, ValueManufacturerPartNumber="Чип-конденсатор керамический, 2,2 пФ, NPO, ± 0,25 пФ, 50 В, 0402, -55...+125°C", Voltage="50 В", HelpURL=https://www.digikey.com/product-detail/en/yageo/CC0402KRX7R7BB104/311-1338-1-ND/2103122, PrintData="Чип-конденсатор керамический; 0402; 2,2 пФ ± 0,25 пФ; 50 В; NPO; (Китай)"
C24 C27: Manufacturer=(Китай), Package=0402, PartNumber=CC0402KRX7R7BB104, Temperature=-55...+125°C, Tolerance="± 0,25 пФ", TypeCapacitor="Чип-конденсатор керамический", TypeDielectric=NPO, ValueManufacturerPartNumber="Чип-конденсатор керамический, 6,8 пФ, NPO, ± 0,25 пФ, 50 В, 0402, -55...+125°C", Voltage="50 В", HelpURL=https://www.digikey.com/product-detail/en/yageo/CC0402KRX7R7BB104/311-1338-1-ND/2103122, PrintData="Чип-конденсатор керамический; 0402; 6,8 пФ ± 0,25 пФ; 50 В; NPO; (Китай)"
C25: Manufacturer=(Китай), Package=0402, PartNumber=CC0402KRX7R7BB104, Temperature=-55...+125°C, Tolerance="± 5%", TypeCapacitor="Чип-конденсатор керамический", TypeDielectric=NPO, ValueManufacturerPartNumber="Чип-конденсатор керамический, 15 пФ, NPO, ± 5%, 50 В, 0402, -55...+125°C", Voltage="50 В", HelpURL=https://www.digikey.com/product-detail/en/yageo/CC0402KRX7R7BB104/311-1338-1-ND/2103122, PrintData="Чип-конденсатор керамический; 0402; 15 пФ ± 5%; 50 В; NPO; (Китай)"
C26: Manufacturer=(Китай), Package=0402, PartNumber=CC0402KRX7R7BB104, Temperature=-55...+125°C, Tolerance="± 5%", TypeCapacitor="Чип-конденсатор керамический", TypeDielectric=NPO, ValueManufacturerPartNumber="Чип-конденсатор керамический, 12 пФ, NPO, ± 5%, 50 В, 0402, -55...+125°C", Voltage="50 В", HelpURL=https://www.digikey.com/product-detail/en/yageo/CC0402KRX7R7BB104/311-1338-1-ND/2103122, PrintData="Чип-конденсатор керамический; 0402; 12 пФ ± 5%; 50 В; NPO; (Китай)"
C28: Manufacturer=(Китай), Package=0402, PartNumber=CC0402KRX7R7BB104, Temperature=-55...+125°C, Tolerance="± 10%", TypeCapacitor="Чип-конденсатор керамический", TypeDielectric=X7R, ValueManufacturerPartNumber="Чип-конденсатор керамический, 10 нФ, X7R, ± 10%, 50 В, 0402, -55...+125°C", Voltage="50 В", HelpURL=https://www.digikey.com/product-detail/en/yageo/CC0402KRX7R7BB104/311-1338-1-ND/2103122, PrintData="Чип-конденсатор керамический; 0402; 10 нФ ± 10%; 50 В; X7R; (Китай)"
DA1: "Linear voltage regulator", CurrentOutput=1.2A, Manufacturer="STMicroelectronics (США)", Package=SOT223, Temperature=-40...+85°C, ValueManufacturerPartNumber="Linear voltage regulator, input 3.9...18V, 0.6V, output 3.3V, 1.2A, -40...+85°C, SOT223", VoltageInput="input 3.9...18V", VoltageOutput="output 3.3V", ComponentType="Linear voltage regulator", HelpURL=https://www.digikey.com/product-detail/en/stmicroelectronics/LDL1117S33R/497-17239-1-ND/7102079, MaxDropout=0.6V, PartNumber=LDL1117S33R, PrintData="Микросхема LDL1117S33R; STMicroelectronics (США)"
DD1: "Cortex-M3", Manufacturer="STMicroelectronics (США)", Built_By=EMA_Jessica, Copyright="Copyright (C) 2016 Accelerated Designs. All rights reserved", PartNumber=STM32L151C6T6, PrintData="Микросхема STM32L151C6T6; STMicroelectronics (США)", RefDes=RefDes, Type=DEV
DD2: "USB-to-UART", Manufacturer="Silicon Labs (США)", Package=28-VFQFN, Temperature=-40...+85°C, ValueManufacturerPartNumber="IC usb-to-uart bridge, USB2.0, 3...3.6V, -40...+85°C, 28-VFQFN", ComponentType="IC usb-to-uart bridge", HelpURL=https://www.digikey.com/product-detail/en/silicon-labs/CP2102N-A02-GQFN28/336-5889-ND/9863477, PartNumber=CP2102N, PrintData="Микросхема CP2102N; Silicon Labs (США)", Standard=USB2.0, Supply=3...3.6V
DD3: "No Description Available", Manufacturer="Microchip Technology(США)", Built_By=EMA_UL_Team, Copyright="Copyright (C) 2018 Accelerated Designs. All rights reserved", PartNumber=24LC512-I/SM, PrintData="Микросхема 24LC512-I/SM; Microchip Technology(США)", RefDes=RefDes, Type=DEV
DD4: "LoRa Transiever", Manufacturer="Semtech Corporation (США)", Built_By=EMA_Cory, Copyright="Copyright (C) 2018 Accelerated Designs. All rights reserved", PartNumber=SX1276IMLTRT, PrintData="Микросхема SX1276IMLTRT; Semtech Corporation (США)", RefDes=RefDes, Type=DEV
DD5: "RS-485-to-UART", Manufacturer="Analog Devices Inc. (США)", Built_By=EMA_UL_Team, Copyright="Copyright (C) 2018 Accelerated Designs. All rights reserved", PartNumber=ADM3485ARZ, PrintData="Микросхема ADM3485ARZ; Analog Devices Inc. (США)", RefDes=RefDes, Type=DEV
DD6: library part SN65HVD232D, "3.3-V Can Transceiver", Manufacturer="Texas Instruments (США)", PACKAGE_DESIGNATOR=D, Copyright="Copyright (C) 2018 Accelerated Designs. All rights reserved", Datasheet_URL=http://www.ti.com/lit/gpn/SN65HVD232, FAMILY_NAME=CAN, INDUSTRY_STD_PKG_TYPE=SOIC, Manufacturer_Part_Number=SN65HVD232D, PartNumber=SN65HVD232, PIN_COUNT=8, PrintData="Микросхема SN65HVD232; Texas Instruments (США)", RefDes=RefDes, Type=DEV
J1: library part Jumper_single, CommentText="\"Перемычка\""
L1: Manufacturer=(Китай), MaxCurrent=50mA, Package=0603, PartNumber=LQM18FN100M00D, Temperature=-55...+125°C, Tolerance="± 10%", TypeInductor=Чип-индуктивность, ValueManufacturerPartNumber="Чип-индуктивность, 10 мкГн, ± 10%, 0603, 50mA, -55...+125°C", HelpURL=https://www.digikey.com/product-detail/en/murata-electronics-north-america/LQM18FN100M00D/490-4025-1-ND/1016285, PrintData="Чип-индуктивность; 0603; 10 мкГн ± 10%; (Китай)"
L2: Manufacturer=(Китай), MaxCurrent=50mA, Package=0603, PartNumber=LQM18FN100M00D, Temperature=-55...+125°C, Tolerance="± 10%", TypeInductor=Чип-индуктивность, ValueManufacturerPartNumber="Чип-индуктивность, 4,7 нГн, ± 10%, 0603, 50mA, -55...+125°C", HelpURL=https://www.digikey.com/product-detail/en/murata-electronics-north-america/LQM18FN100M00D/490-4025-1-ND/1016285, PrintData="Чип-индуктивность; 0603; 4,7 нГн ± 10%; (Китай)"
L3 L4: Manufacturer=(Китай), MaxCurrent=50mA, Package=0603, PartNumber=LQM18FN100M00D, Temperature=-55...+125°C, Tolerance="± 10%", TypeInductor=Чип-индуктивность, ValueManufacturerPartNumber="Чип-индуктивность, 22 нГн, ± 10%, 0603, 50mA, -55...+125°C", HelpURL=https://www.digikey.com/product-detail/en/murata-electronics-north-america/LQM18FN100M00D/490-4025-1-ND/1016285, PrintData="Чип-индуктивность; 0603; 22 нГн ± 10%; (Китай)"
L5 L6: Manufacturer=(Китай), MaxCurrent=50mA, Package=0603, PartNumber=LQM18FN100M00D, Temperature=-55...+125°C, Tolerance="± 10%", TypeInductor=Чип-индуктивность, ValueManufacturerPartNumber="Чип-индуктивность, 18 нГн, ± 10%, 0603, 50mA, -55...+125°C", HelpURL=https://www.digikey.com/product-detail/en/murata-electronics-north-america/LQM18FN100M00D/490-4025-1-ND/1016285, PrintData="Чип-индуктивность; 0603; 18 нГн ± 10%; (Китай)"
R1 R5: Manufacturer=(Китай), Package=0402, PartNumber=RC0402JR-07100RL, Power="0,1 Вт", Temperature=-55...+125°C, Tolerance="± 5%", TypeResistor=Чип-резистор, ValueManufacturerPartNumber="Чип-резистор, 10 кОм, ± 5%, 0402, 0,1 Вт, -55...+125°C", HelpURL=https://www.digikey.com/product-detail/en/yageo/RC0402JR-07100RL/311-100JRCT-ND/729362, PrintData="Чип-резистор; 0402; 10 кОм ± 5%; (Китай)"
R2: Manufacturer=(Китай), Package=0402, PartNumber=RC0402JR-07100RL, Power="0,1 Вт", Temperature=-55...+125°C, Tolerance="± 5%", TypeResistor=Чип-резистор, ValueManufacturerPartNumber="Чип-резистор, 36 Ом, ± 5%, 0402, 0,1 Вт, -55...+125°C", HelpURL=https://www.digikey.com/product-detail/en/yageo/RC0402JR-07100RL/311-100JRCT-ND/729362, PrintData="Чип-резистор; 0402; 36 Ом ± 5%; (Китай)"
R3 R4 R8 R9 R12 R13: Manufacturer=(Китай), Package=0402, PartNumber=RC0402JR-07100RL, Power="0,1 Вт", Temperature=-55...+125°C, Tolerance="± 5%", TypeResistor=Чип-резистор, ValueManufacturerPartNumber="Чип-резистор, 5,1 Ом, ± 5%, 0402, 0,1 Вт, -55...+125°C", HelpURL=https://www.digikey.com/product-detail/en/yageo/RC0402JR-07100RL/311-100JRCT-ND/729362, PrintData="Чип-резистор; 0402; 5,1 Ом ± 5%; (Китай)"
R6 R10: Manufacturer=(Китай), Package=0402, PartNumber=RC0402JR-07100RL, Power="0,1 Вт", Temperature=-55...+125°C, Tolerance="± 5%", TypeResistor=Чип-резистор, ValueManufacturerPartNumber="Чип-резистор, 4,7 кОм, ± 5%, 0402, 0,1 Вт, -55...+125°C", HelpURL=https://www.digikey.com/product-detail/en/yageo/RC0402JR-07100RL/311-100JRCT-ND/729362, PrintData="Чип-резистор; 0402; 4,7 кОм ± 5%; (Китай)"
R7 R11: Manufacturer=(Китай), Package=0402, PartNumber=RC0402JR-07100RL, Power="0,1 Вт", Temperature=-55...+125°C, Tolerance="± 5%", TypeResistor=Чип-резистор, ValueManufacturerPartNumber="Чип-резистор, 120 Ом, ± 5%, 0402, 0,1 Вт, -55...+125°C", HelpURL=https://www.digikey.com/product-detail/en/yageo/RC0402JR-07100RL/311-100JRCT-ND/729362, PrintData="Чип-резистор; 0402; 120 Ом ± 5%; (Китай)"
R14 R15: Manufacturer=(Китай), Package=0402, PartNumber=RC0402JR-07100RL, Power="0,1 Вт", Temperature=-55...+125°C, Tolerance="± 5%", TypeResistor=Чип-резистор, ValueManufacturerPartNumber="Чип-резистор, 1 кОм, ± 5%, 0402, 0,1 Вт, -55...+125°C", HelpURL=https://www.digikey.com/product-detail/en/yageo/RC0402JR-07100RL/311-100JRCT-ND/729362, PrintData="Чип-резистор; 0402; 1 кОм ± 5%; (Китай)"
SB1: "dip-Switch", Manufacturer="Ningbo Connfly Electronic (Китай)", PartNumber=DS1040-01RT, PrintData="DIP-переключатель DS1040-01RT; Ningbo Connfly Electronic (Китай)", TypeButton=DIP-переключатель
SB2 SB3: library part Button_tactile, Manufacturer=(Китай), Package="6x6x5 мм", PartNumber=FSM2JSMAATR, CommentText="\"Кнопка\"", HelpURL=https://www.digikey.com/product-detail/en/te-connectivity-alcoswitch-switches/FSM2JSMAATR/450-1792-1-ND/3503931, PrintData="Кнопка тактовая SMD; 6x6x5 мм; (Китай)", TypeButton="Кнопка тактовая SMD", ValueManufacturerPartNumber="Кнопка тактовая SMD, 6x6x5 мм"
VB1: "AA Battery Holder", Manufacturer="KLS Electronic Co. (Китай)", PartNumber=L-KLS5-801-D, PrintData="Отсек батарейный L-KLS5-801-D; KLS Electronic Co. (Китай)", TypeMod="Отсек батарейный"
VD1: Color=RED, ColorParameter=Green, Manufacturer=(Китай), Package=0603, Temperature=-55...+150°C, ValueManufacturerPartNumber="Чип LED-светодиод, Green, *, *, 0603, -55...+150°C", HelpURL=https://www.smd.ru/katalog/rezistory_i_potenciometry/postoyannye/0402/, PrintData="Чип LED-светодиод *; 0603; (Китай)", TypeDiode="Чип LED-светодиод"
VD2 VD5 VD7: Color=GREEN, ColorParameter=Green, Manufacturer=(Китай), Package=0603, PartNumber=BL-HG636D, Temperature=-55...+150°C, ValueManufacturerPartNumber="Чип LED-светодиод, Green, *, *, 0603, -55...+150°C", HelpURL=https://www.smd.ru/katalog/rezistory_i_potenciometry/postoyannye/0402/, PrintData="Чип LED-светодиод BL-HG636D; 0603; (Китай)", TypeDiode="Чип LED-светодиод"
VD3 VD4 VD6: Color=BLUE, ColorParameter=Green, Manufacturer=(Китай), Package=0603, PartNumber=BL-HB536A, Temperature=-55...+150°C, ValueManufacturerPartNumber="Чип LED-светодиод, Green, *, *, 0603, -55...+150°C", HelpURL=https://www.smd.ru/katalog/rezistory_i_potenciometry/postoyannye/0402/, PrintData="Чип LED-светодиод BL-HB536A; 0603; (Китай)", TypeDiode="Чип LED-светодиод"
X1: library part PLS-4, CurrentMax=3A, Manufacturer=Connfly, VoltageMax=500VAC, CommentText=SWD-программатор, HelpURL=https://www.chipdip.ru/product/pls-4, Multichannel=4pin, PartNumber=PLS-4, Pitch=2.54mm, PrintData="Вилка прямая PLS-4", TypeConnector=Connector, ValueManufacturerPartNumber="Connector, 4pin, 2.54mm, 500VAC, 3A"
X2: library part Connector_USB_micro_B, Manufacturer="Hirose Electric (Япония)", PartNumber=ZX62-B-5PA, CommentText=USB, HelpURL=https://www.digikey.com/product-detail/en/hirose-electric-co-ltd/ZX62-B-5PA/H11579CT-ND/1851090, PrintData="Разъем micro-USB; Hirose Electric (Япония)", TypeConnector="Разъем micro-USB", ValueManufacturerPartNumber="Разъем micro-USB"
X3 X4: library part Connector_terminal_3pin, CurrentMax=10A, Manufacturer=Degson, PartNumber=DG350-3.5-03P-14, VoltageMax=300VAC, HelpURL=https://www.chipdip.ru/product/dg350-3.5-03p-12, Multichannel=3pin, Pitch=3.5mm, PrintData="Клеммник трехконтактный DG350-3.5-03P-14; Degson", TypeConnector="Клеммник трехконтактный", ValueManufacturerPartNumber="Клеммник трехконтактный, 3pin, 3.5mm, 300VAC, 10A"
  X3: CommentText=RS-485
  X4: CommentText=CAN
ZQ1: "8 MHz SMD-Oscillator", Capacity="16 пФ", Manufacturer="NDK America (США)", Tolerance="150/50 ppm", Built_By=EMA_Cory, Copyright="Copyright (C) 2018 Accelerated Designs. All rights reserved", Datasheet=https://www.ndk.com/images/products/catalog/c_NX3225GD-STD-CRA-3_e.pdf, PartNumber=NX3225GD, PrintData="Резонатор кварцевый NX3225GD; 8 МГц; 150/50 ppm; 16 пФ; NDK America (США)", RefDes=RefDes, TypeOsc="Резонатор кварцевый"
ZQ2: library part NX3225SA, "32 MHz SMD-Oscillator", Capacity="16 пФ", Manufacturer="NDK America (США)", Tolerance="15/10 ppm", Built_By=EMA_Cory, Copyright="Copyright (C) 2018 Accelerated Designs. All rights reserved", PartNumber=NX3225GA, PrintData="Резонатор кварцевый NX3225GA; 32 МГц; 15/10 ppm; 16 пФ; NDK America (США)", RefDes=RefDes, TypeOsc="Резонатор кварцевый"

## Free pads (board coordinates)
  round 0 hole 3.2 unplated: 2(10,3.95) 2(53,3.95) 3(23,61.45) 4(50,61.45)
  round 3.5 on Top Solder: ""(10,3.95) ""(23,61.45) ""(50,61.45) ""(53,3.95)
  round 3.5 on Bottom Solder: ""(10,3.95) ""(23,61.45) ""(50,61.45) ""(53,3.95)
  round 1 on Top Overlay: ""(24.25,50.525)
  round 0.5 on Top Overlay: ""(40.8,40.45) ""(44.975,33.875) ""(47,50.425)

## Via types
v1: diameter 0.7, hole 0.3, Top Layer to Bottom Layer, tented both sides, 115 vias
v2: diameter 0.6, hole 0.3, Top Layer to Bottom Layer, 5 vias
v3: diameter 0.6, hole 0.3, Top Layer to Bottom Layer, tented both sides, 1 vias

## Nets (pads, with @x,y where several pads share a name; then routed paths per layer and width w, separated by ;. In a path a pad name is that pad's centre, name@x,y a point inside that pad or via, vN(x,y) a via of type N, cw(c..) or ccw(c..) an arc to the next point about the centre after c; other vN are vias at no path point)
485_N: DD5.7 R7.1 R10.2 X3.2 | length 10.4
  Top Layer w0.15: DD5.7 50.524,31.475 51.725,31.475 52.175,31.025 53.087,31.025 R7.1@53.406,31.344 ; R10.2 R7.1 R7.1@53.406,31.344 ; X3.2 57.8,31.113 57.712,31.025 55.775,31.025 53.713,31.025 53.625,31.113 53.625,31.125 R7.1@53.406,31.344
485_P: DD5.6 R6.1 R7.2 X3.1 | length 10.4
  Top Layer w0.15: DD5.6 50.529,30.2 51.7,30.2 52.175,30.675 53.087,30.675 53.175,30.587 53.175,30.575 R7.2 ; R6.1 R7.2 ; X3.1 57.8,30.587 57.712,30.675 55.63,30.675 53.713,30.675 53.625,30.587 53.625,30.575 R7.2
+3.3V: C3.2 C9.2 C10.2 C11.2 C12.2 C13.2 C15.2 C20.2 C21.2 C22.2 DA1.4 DD1.1 DD1.24 DD1.36 DD1.48 DD3.8 DD4.3 DD4.14 DD4.24 DD5.8 DD6.3 J1.2 L1.2 R1.2 R2.2 R6.2 R14.2 R15.2 | length 41.5
  Top Layer w0.2: C11.2 31.875,31.675 32.05,31.85 32.05,32.1 32.4,32.45 DD1.24 ; DD1.36 40.15,30.1 40.5,29.75 40.5,29.225 C12.2 ; DD1.1 40.15,40.2 40.425,40.475 41,40.475 v1(41.6,41.075) ; DD1.48 42.575,37.95 42.8,38.175 42.8,38.375 43.125,38.7 43.425,38.7 C13.2
  Top Layer w0.25: C15.2 18.9,37.55 19.35,38 DD4.3 ; DD4.24 26.125,40.95 26.45,41.275 26.45,41.825 C20.2 ; C22.2 C21.2 DD4.14
  Top Layer w0.4: v1(50.55,50) 50.555,50.005 50.555,51.674 DD6.3
  Top Layer w0.5: v1(16.95,37.55) C15.2 ; v1(18.45,56.625) 19.35,56.625 R14.2 ; C20.2 v1(26.5,42.9) ; C22.2 27.426,32.099 v1(27.426,31.102) ; v1(28.85,57.95) 30.475,57.95 ; J1.2 30.05,58.375 30.475,57.95 ; C9.2 C11.2 v1(31.375,30.65) ; v1(31.35,49.55) 31.355,49.555 DD3.8 ; R1.2 31.575,59.375 31.575,58.35 31.175,57.95 30.475,57.95 ; L1.2 v1@37.1,45.8 ; v1(38.15,58.4) R15.2 ; C12.2 C10.2 41.075,27.475 v1(41.825,27.475) ; C13.2 v1(44.55,38.725) ; DD5.8 50.519,32.75 v1(52.125,32.75) ; v1(53.4,27.35) R6.2
  other v1: 9.975,37.975 11.425,37.975 12.825,38.025 37.1,45.8
CAN_N: DD6.6 R11.1 X4.2 | length 13.8
  Top Layer w0.15: DD6.6 50.56,55.99 50.1,55.53 50.1,54.725 51.05,53.775 52.425,53.775 52.525,53.675 53.237,53.675 53.325,53.763 53.325,53.775 R11.1 53.775,53.775 53.775,53.763 53.863,53.675 54.125,53.675 54.775,54.325 54.775,55.045 55.405,55.675 56.785,55.675 57.712,55.675 57.8,55.763 X4.2
CAN_P: DD6.7 R11.2 X4.1 | length 14.4
  Top Layer w0.15: DD6.7 49.29,55.985 49.75,55.525 49.75,54.58 50.905,53.425 52.28,53.425 52.38,53.325 53.237,53.325 53.325,53.237 53.325,53.225 R11.2 53.775,53.225 53.775,53.237 53.863,53.325 54.27,53.325 55.125,54.18 55.125,54.9 55.55,55.325 56.64,55.325 57.712,55.325 57.8,55.237 X4.1
CP2102_CTS: DD1.27 DD2.23 | length 30.2
  Top Layer w0.2: DD1.27 35.665,30.998 35.665,31.99 36.349,32.675 v1(37.8,32.675)
  Top Layer w0.25: DD2.23 51.45,46.3 51.475,46.325 52.235,46.325 53.9,44.66 v1(53.9,43.025)
  Bottom Layer w0.25: v1@37.8,32.753 v1(37.8,32.675) 39.375,34.25 39.375,34.625 44.65,39.9 51.775,39.9 53.35,41.475 53.35,42.475 v1(53.9,43.025)
CP2102_RTS: DD1.26 DD2.24 | length 27.1
  Top Layer w0.2: v1(34.8,32.404) 34.8,32.269 35.15,31.919 DD1.26
  Top Layer w0.25: DD2.24 v1(50.95,46.975)
  Bottom Layer w0.25: v1(34.8,32.404) 36.259,32.404 37.452,33.597 37.452,33.818 38.425,34.791 38.866,34.791 44.55,40.475 44.55,43.575 45.85,44.875 45.85,44.905 47.92,46.975 v1(50.95,46.975)
CP2102_RX: DD1.21 DD2.25 R4.2 | length 28.4
  Top Layer w0.2: DD1.21 33.185,33.952 33.26,33.877 v1(36.777,33.877)
  Top Layer w0.25: v1(46.05,48.65) 46.485,48.65 47.017,48.117 47.017,48.058 47.225,47.85 R4.2 48.961,47.85 50.4,46.411 50.4,46.305 50.45,46.255 DD2.25
  Bottom Layer w0.25: v1(36.777,33.877) 44.1,41.2 44.1,43.761 44.7,44.361 44.7,47.3 v1(46.05,48.65)
CP2102_TX: DD1.22 DD2.26 R3.2 | length 25.4
  Top Layer w0.2: DD1.22 35.243,33.45 35.466,33.227 v1(35.602,33.227)
  Top Layer w0.25: v1(44.025,45.375) 44.15,45.375 45.475,46.7 R3.2 49.475,46.7 49.95,46.225 DD2.26
  Bottom Layer w0.25: v1(35.602,33.227) 35.602,33.252 36.102,33.752 36.102,34.172 42.75,40.82 42.75,44.1 v1(44.025,45.375)
D: DD1.31 DD6.1 R12.2 | length 53.2
  Top Layer w0.2: R12.2 37.5,29.725 37.65,29.875 DD1.31
  Top Layer w0.35: v1(36.55,48.825) 40.1,48.825 41.725,50.45 47.7,50.45 48.025,50.775 48.025,51.674 DD6.1 ; R12.2 37.525,29.15 38.2,29.15 38.45,28.9 v1(38.45,26.975)
  Bottom Layer w0.35: v1(36.55,48.825) 36.501,48.825 35.601,49.725 33.55,49.725 28.45,44.625 28.45,32.25 33.725,26.975 v1(38.45,26.975)
DI: DD1.12 DD5.4 R9.2 | length 25
  Top Layer w0.2: R9.2 34.45,40.7 34.65,40.5 DD1.12 34.65,38.525 36.3,36.875 v1(37.3,36.875)
  Top Layer w0.35: v1(41.975,29.575) 42.615,28.935 45.576,28.935 DD5.4
  Bottom Layer w0.2: v1(37.3,36.875) 37.3,36.273 34.15,33.123 34.15,32.135 35.61,30.675 40.25,30.675 41.35,29.575 v1(41.975,29.575)
GND: C1.1 C2.1 C3.1 C4.1 C5.1 C6.1 C7.1 C8.1 C9.1 C10.1 C11.1 C12.1 C13.1 C14.1 C15.1 C16.1 C18.1 C19.1 C20.1 C21.1 C22.1 C24.1 C25.1 C26.1 C27.1 C28.1 C29.1 C30.1 C31.1 C32.1 DA1.1 DD1.8 DD1.23 DD1.35 DD1.47 DD2.0 DD2.3 DD3.1 DD3.2 DD3.3 DD3.4 DD4.0 DD4.15 DD4.23 DD4.26 DD5.5 DD6.2 L6.2 R5.1 R10.1 SB2.2 SB3.2 VB1.2 VD1.2 VD2.2 VD3.2 VD4.2 VD5.2 VD6.2 VD7.2 X1.4 X2.0 X2.4 X2.5 X3.3 X4.3 ZQ2.2 ZQ2.4 | length 72
  Top Layer w0.2: C11.1 32.05,32.775 32.225,32.95 DD1.23 ; DD1.8 36.65,40.625 36.825,40.8 C5.1 ; C8.1 37.05,42.275 37,42.225 37,41.875 C5.1 ; v1@37.681,41.294 37.231,41.294 C5.1 ; C12.1 39.375,29.8 39.65,30.075 DD1.35 ; DD1.47 42.725,37.45 42.9,37.625 C13.1
  Top Layer w0.25: C28.1 24.35,41.3 24.825,40.825 DD4.26 ; DD4.23 26.775,40.9 27.05,41.175 27.425,41.175 27.6,41.35 C20.1 ; DD4.15 29.25,35.4 v1(29.55,35.1) ; v1(46.525,44.625) 47.35,43.8 DD2.3
  Top Layer w0.3: v1(1.95,40.575) 1.963,40.588 1.963,41.638 C26.1 ; C27.1 v1(5.325,45.925) ; C25.1 v1(8.275,43.875) ; C24.1 v1(14.9,43.75) ; L6.2 v1(20.125,42.275)
  Top Layer w0.5: v1(2.45,31.3) C2.1 ; v1(2.7,37.9) DA1.1 ; v1(12.925,33.4) C3.1 ; v1(14.7,32.8) VD1.2 ; v1(16.175,33.55) 17.525,33.55 ZQ2.4 ; v1(16.975,36.45) C15.1 19.275,36.45 19.6,36.125 20.175,36.125 C16.1 ; v1(18.65,38.65) C14.1 ; VD5.2 VD4.2 19.35,47.152 18.875,46.677 v1(18.875,46.65) 18.902,46.65 19.127,46.425 C30.1 ; C18.1 v1(20.775,30.425) ; ZQ2.2 19.775,31.95 20.625,31.95 20.825,32.15 C19.1 21.625,32.125 v1(22.55,32.125) ; v1(21.5,54.675) C31.1 ; v1(22.75,43.175) 22.804,43.175 22.954,43.325 C29.1 ; v1(23.25,27.425) VD6.2 ; v1(23.25,29.175) VD7.2 ; v1(23.425,42.45) 24.125,42.45 24.35,42.225 24.35,41.95 C28.1 ; v1(25.3,32.1) C22.1 ; v1(25.325,33.175) C21.1 ; C20.1 v1(27.6,42.9) ; C9.1 C11.1 v1(31.375,33.775) ; v1(33.925,43.925) 33.944,43.906 34.319,43.906 34.625,43.6 C6.1 ; R5.1 v1(37.125,59.375) ; v1@37.681,41.294 37.7,41.275 v1(37.725,41.275) ; v1(38.5,45.6) C7.1 ; C12.1 C10.1 39.4,28.05 39.4,27.6 40.15,26.85 v1(40.175,26.85) ; v1(42.05,47.75) 43.175,47.75 VD2.2 ; v1(42.075,49.325) VD3.2 ; C32.1 v1(43.375,58.4) ; C13.1 v1(44.55,37.625) ; SB3.2@45.075,52.225 SB3.2@45.175,52.125 ; v1(45.425,40.675) C4.1 ; v1(48.95,37.775) C1.1 ; DD6.2 49.3,51.669 v1(49.3,50.275) ; DD5.5 50.519,28.95 v1(52.05,28.95) ; R10.1 v1(53.4,34.75)
  other v1: 24.65,45.95 24.625,47.625 0.675,47.65 2.175,47.65 4.325,47.65 6.175,47.65 8.15,47.65 10.175,47.65 12.175,47.65 14.175,47.65 15.675,48.65 24.65,49.425 15.675,50.65 25.825,52.075 38.375,52.075 40.625,52.075 43,52.1 28.075,52.125 30.325,52.125 15.675,52.65 15.675,54.65 15.675,56.65 15.675,58.65 15.675,60.65 15.675,62.65 15.675,64.65
  other v2: 58.95,39.15 60.7,39.175 57.35,39.2 55.65,48.525 55.65,49.825
NetA1_1: A1.1 C27.2 L5.1 | length 6
  Top Layer w0.3: L5.1 C27.2 A1.1
NetC1_2: C1.2 DD2.7 DD2.8 X2.1 | length 15.9
  Top Layer w0.25: DD2.7 47.675,41.8 47.425,41.55 47.425,40.55 48.175,39.8 C1.2 ; DD2.8 C1.2 ; X2.1 55.48,43.65 53.863,42.033 53.863,40.588 53.175,39.9 49.8,39.9 49.7,39.8 C1.2
NetC2_2: C2.2 DA1.3 SB1.2
NetC4_2: C4.2 DD2.6 | length 1.8
  Top Layer w0.25: C4.2 47.1,42.3 DD2.6 DD2.6@48.125,42.275
NetC5_2: C5.2 C6.2 DD1.9 L1.1 | length 5.2
  Top Layer w0.2: C5.2 35.725,41.45 36.15,41.025 DD1.9
  Top Layer w0.5: L1.1@35.575,44.4 35.575,43.475 35.725,43.325 C6.2 C5.2
NetC7_2: C7.2 DD1.5 ZQ1.1 | length 7.8
  Top Layer w0.2: DD1.5 38.15,40.225 38.16,40.225 38.56,40.625 39.45,40.625 40.8,41.975 ZQ1.1@40.8,43.348
  Top Layer w0.5: C7.2 40.789,45.586 40.789,43.359 ZQ1.1@40.8,43.348
NetC8_2: C8.2 DD1.6 ZQ1.2 | length 6.6
  Top Layer w0.2: DD1.6 37.65,40.291 37.984,40.625 37.994,40.625 38.898,41.528 ZQ1.2
  Top Layer w0.5: C8.2 37.475,43.975 38.1,43.35 ZQ1.2
NetC14_2: C14.2 DD4.2 | length 1.8
  Top Layer w0.25: C14.2 DD4.2
NetC16_2: C16.2 DD4.4 | length 2.4
  Top Layer w0.25: C16.2 21.2,37.2 21.35,37.35 DD4.4
NetC17_1: C17.1 C25.2 L4.2 | length 2.7
  Top Layer w0.3: L4.2 C25.2 C17.1
NetC17_2: C17.2 L3.1 | length 1.5
  Top Layer w0.3: C17.2 L3.1@12.075,41.675
NetC18_2: C18.2 DD4.5 ZQ2.1 | length 10.3
  Top Layer w0.25: ZQ2.1@17.652,31.975 ZQ2.1 17.575,31.95 18.325,31.95 18.675,32.3 18.675,34.255 18.917,34.497 19.736,34.497 21.914,36.675 22.475,36.675 DD4.5
  Top Layer w0.5: ZQ2.1@17.575,31.95 17.575,30.725 17.85,30.45 18.375,30.45 C18.2
NetC19_2: C19.2 DD4.6 ZQ2.3 | length 5.4
  Top Layer w0.25: 20.725,33.525 21.1,33.9 21.1,34.985 21.99,35.875 22.1,35.875 22.275,36.05 DD4.6
  Top Layer w0.5: ZQ2.3@19.8,33.525 20.725,33.525 21,33.25 C19.2
NetC26_2: C26.2 L4.1 L5.2 | length 3.9
  Top Layer w0.3: L5.2 C26.2 3.1,41.675 L4.1
NetDD1_34: DD1.34 R1.1 X1.2 | length 57.3
  Top Layer w0.2: DD1.34 v1(39.15,32.65)
  Top Layer w0.5: X1.2 32.603,61.673 32.603,59.403 R1.1 32.6,58.677 33.175,58.102 v1(33.175,58.075)
  Bottom Layer w0.5: v1(33.175,58.075) 33.175,58.05 36.775,54.45 47.231,54.45 55.378,46.304 55.378,41.571 49.913,36.106 43.106,36.106 39.65,32.65 v1(39.15,32.65)
NetDD1_37: DD1.37 R5.2 X1.3 | length 53.5
  Top Layer w0.2: DD1.37 42.575,32.45 v1(43.525,33.4)
  Top Layer w0.5: X1.3 35.148,61.673 35.148,59.378 R5.2 v1(35.15,57.975)
  Bottom Layer w0.5: v1(35.15,57.975) 35.15,57.9 37.55,55.5 47.171,55.5 56.078,46.594 56.078,40.178 51.2,35.3 45.425,35.3 v1(43.525,33.4)
NetDD1_42: DD1.42 DD3.6 | length 21.1
  Top Layer w0.2: DD3.6 39.727,47.015 40.067,46.675 v3(40.175,46.675) ; v1(39,38.025) 39,36.275 40.325,34.95 DD1.42
  Bottom Layer w0.2: v1(39,38.025) 40.175,39.2 v3@40.175,46.6
NetDD1_43: DD1.43 DD3.5 | length 27.5
  Top Layer w0.2: DD3.5 31.98,45.745 31.75,45.975 31.75,47.05 32.325,47.625 40.361,47.625 42.675,45.311 42.675,39.35 42.15,38.825 41.216,38.825 40.025,37.634 40.025,36.05 40.625,35.45 DD1.43
NetDD1_45: DD1.45 DD3.7 | length 25.6
  Top Layer w0.2: DD3.7 36.171,48.285 36.281,48.175 36.819,48.175 36.929,48.285 40.266,48.285 43.075,45.477 43.075,44.8 43.875,44 43.875,40.925 46.013,38.788 46.013,36.763 45.7,36.45 DD1.45
NetJ1_1: J1.1 X1.1 | length 1.9
  Top Layer w0.8: J1.1@30.058,59.75 30.058,61.668 X1.1
NetR2_1: R2.1 VD1.1 | length 2.1
  Top Layer w0.5: R2.1 14.35,36.875 14.7,36.525 VD1.1
NetR3_1: R3.1 VD2.1 | length 1.8
  Top Layer w0.5: VD2.1 R3.1
NetR4_1: R4.1 VD3.1 | length 3.6
  Top Layer w0.5: VD3.1 44.95,49.65 46.375,49.65 47.175,48.85 R4.1
NetR8_1: R8.1 VD4.1 | length 15.7
  Top Layer w0.5: VD4.1 21.954,47.9 22.95,46.904 22.95,45.739 24.114,44.575 28.525,44.575 31.425,41.675 R8.1
NetR9_1: R9.1 VD5.1 | length 18.8
  Top Layer w0.5: VD5.1 22.55,49.625 23.35,50.425 27.325,50.425 27.85,49.9 27.85,46.425 32.975,41.3 R9.1
NetR12_1: R12.1 VD6.1 | length 11.7
  Top Layer w0.5: VD6.1 37.125,27.425 37.5,27.8 R12.1
NetR13_1: R13.1 VD7.1 | length 10.3
  Top Layer w0.5: VD7.1 27.875,29.175 28.925,28.125 36.125,28.125 R13.1
NetSB1_1: SB1.1 VB1.1
NRESET: DD1.18 DD4.7 | length 17.5
  Top Layer w0.2: DD4.7 22.5,33.575 25.725,30.35 28.45,30.35 29.075,30.975 29.075,33.55 30.975,35.45 DD1.18
NRST: C32.2 DD1.7 R15.1 SB3.1 | length 26.4
  Top Layer w0.2: DD1.7 37.15,38.525 v1(37.975,37.7)
  Top Layer w0.5: SB3.1@36.175,56.625 36.175,55.1 34.375,53.3 34.375,50.775 35.525,49.625 39.2,49.625 v1(39.275,49.55)
  Bottom Layer w0.2: v1(37.975,37.7) 37.975,39.65 39.275,40.95 v1(39.275,49.55)
R: DD1.30 DD6.4 R13.2 | length 62.5
  Top Layer w0.2: R13.2 36.7,29.175 36.825,29.3 36.825,29.7 37.15,30.025 DD1.30
  Top Layer w0.35: v1(29.375,29.175) R13.2 ; v1(48.95,49.275) 51.175,49.275 51.85,49.95 51.85,51.659 DD6.4
  Bottom Layer w0.35: v1(29.375,29.175) 28.905,29.175 27.705,30.375 25.875,30.375 23.12,33.13 23.12,34.03 21.5,35.65 21.5,38.855 25.225,42.58 25.225,44.975 30.55,50.3 47.925,50.3 v1(48.95,49.275)
RE/DE: DD1.11 DD5.2 DD5.3 | length 29.1
  Top Layer w0.2: DD1.11 35.15,38.591 35.641,38.1 v1(36.5,38.1)
  Top Layer w0.35: DD5.3 45.571,30.2 43.675,30.2 v1(42.875,31) 43.925,31 44.425,31.5 45.571,31.5 DD5.2
  Bottom Layer w0.2: v1(36.5,38.1) 36.5,36.625 33.725,33.85 33.725,31.715 35.165,30.275 39.917,30.275 41.967,28.225 42.55,28.225 42.875,28.55 v1(42.875,31)
RFI_LF: C23.1 DD4.1 L6.1 | length 5.9
  Top Layer w0.25: L6.1@18.939,40.886 L6.1 ; 21.45,39.55 21.7,39.3 DD4.1
  Top Layer w0.3: C23.1 L6.1@18.939,40.886 ; L6.1 20.125,40.875 21.45,39.55
RFO_LF: C23.2 C24.2 DD4.28 L2.2 L3.2 | length 13.1
  Top Layer w0.25: DD4.28 23.525,41.125
  Top Layer w0.3: L3.2 C24.2 14.911,41.664 C23.2 17.425,42.653 17.425,42.975 18.35,43.9 18.9,43.9 18.925,43.875 20.775,43.875 23.525,41.125
RO: DD1.13 DD5.1 R8.2 | length 17.9
  Top Layer w0.2: R8.2 31.425,38.175 31.65,37.95 DD1.13 34.05,37.95 37.45,34.55 38.175,34.55 40.95,31.775 43.05,31.775 44.03,32.755 DD5.1
SPI_MISO: DD1.16 DD4.17 | length 4.8
  Top Layer w0.2: v1(31.725,36.7) 31.975,36.45 DD1.16
  Top Layer w0.25: DD4.17 v1(29.5,36.7)
  Bottom Layer w0.25: v1(29.5,36.7) v1(31.725,36.7)
SPI_MOSI: DD1.17 DD4.18 | length 5.3
  Top Layer w0.2: DD4.18 30.075,37.35 31.475,35.95 DD1.17
SPI_NSS: DD1.14 DD4.19 | length 5
  Top Layer w0.2: DD4.19 30.3,38 30.85,37.45 DD1.14
SPI_SCK: DD1.15 DD4.16 | length 9.1
  Top Layer w0.2: DD4.16 29.075,36.05 29.25,35.875 v1(30.175,35.875) ; DD1.15 34.35,36.95 34.875,36.425 v1(34.875,36.013)
  Bottom Layer w0.25: v1(30.175,35.875) 30.25,35.875 30.475,35.65 34.512,35.65 v1(34.875,36.013)
USB_N: DD2.5 X2.2 | length 17.8
  Top Layer w0.25: v1(45.625,42.525) 45.72,42.525 45.995,42.8 DD2.5 ; v1(54.578,44.152) 54.723,44.152 54.75,44.125 54.925,44.3 X2.2
  Bottom Layer w0.25: v1(45.625,42.525) 46.425,42.525 46.7,42.8 47.711,42.8 48.3,43.389 48.3,45.05 49.1,45.85 51.709,45.85 51.709,45.779 53.114,44.375 53.747,44.375 53.786,44.414 54.206,44.414 54.468,44.152 v1(54.578,44.152)
USB_P: DD2.4 X2.3 | length 17.7
  Top Layer w0.25: v1(45.625,43.625) 45.72,43.625 46.045,43.3 DD2.4 ; v1(54.55,45.15) 54.7,45.15 54.9,44.95 X2.3@57.45,44.95
  Bottom Layer w0.25: v1(45.625,43.625) 46.375,43.625 46.75,43.25 47.525,43.25 47.85,43.575 47.85,45.236 48.914,46.3 51.896,46.3 52.159,46.036 52.159,45.966 53.3,44.825 53.561,44.825 53.6,44.864 54.179,44.864 54.465,45.15 v1(54.55,45.15)
VR_PA: C28.2 C29.2 C30.2 DD4.25 L2.1 | length 10.5
  Top Layer w0.25: C28.2 25.475,41.7 DD4.25
  Top Layer w0.3: L2.1 20.4,45.325 22.125,45.325 23.475,43.975 24.925,43.975 25.2,43.7 25.2,43.35 C29.2 25.175,42.7 25.4,42.475 25.4,41.775 C28.2
WKUP: C31.2 DD1.10 R14.1 SB2.1 | length 31.4
  Top Layer w0.2: SB2.1@23.4,56.375 23.4,56.6 23.4,54.75 21.625,52.975 21.625,51.275 21.9,51 28.775,51 31,48.775 31,45.197 34.022,42.175 34.599,42.175 35.125,41.65 35.125,41.216 35.65,40.69 DD1.10
  Top Layer w0.5: R14.1 C31.2 SB2.1@23.4,56.6
  Top Layer w1.1: SB2.1@32.375,56.625 SB2.1@32.4,56.6